# EAGLE board Qwiic Distance Sensor - VL53L1X-Panel (EAGLE 9.1.0), part 1 of 5
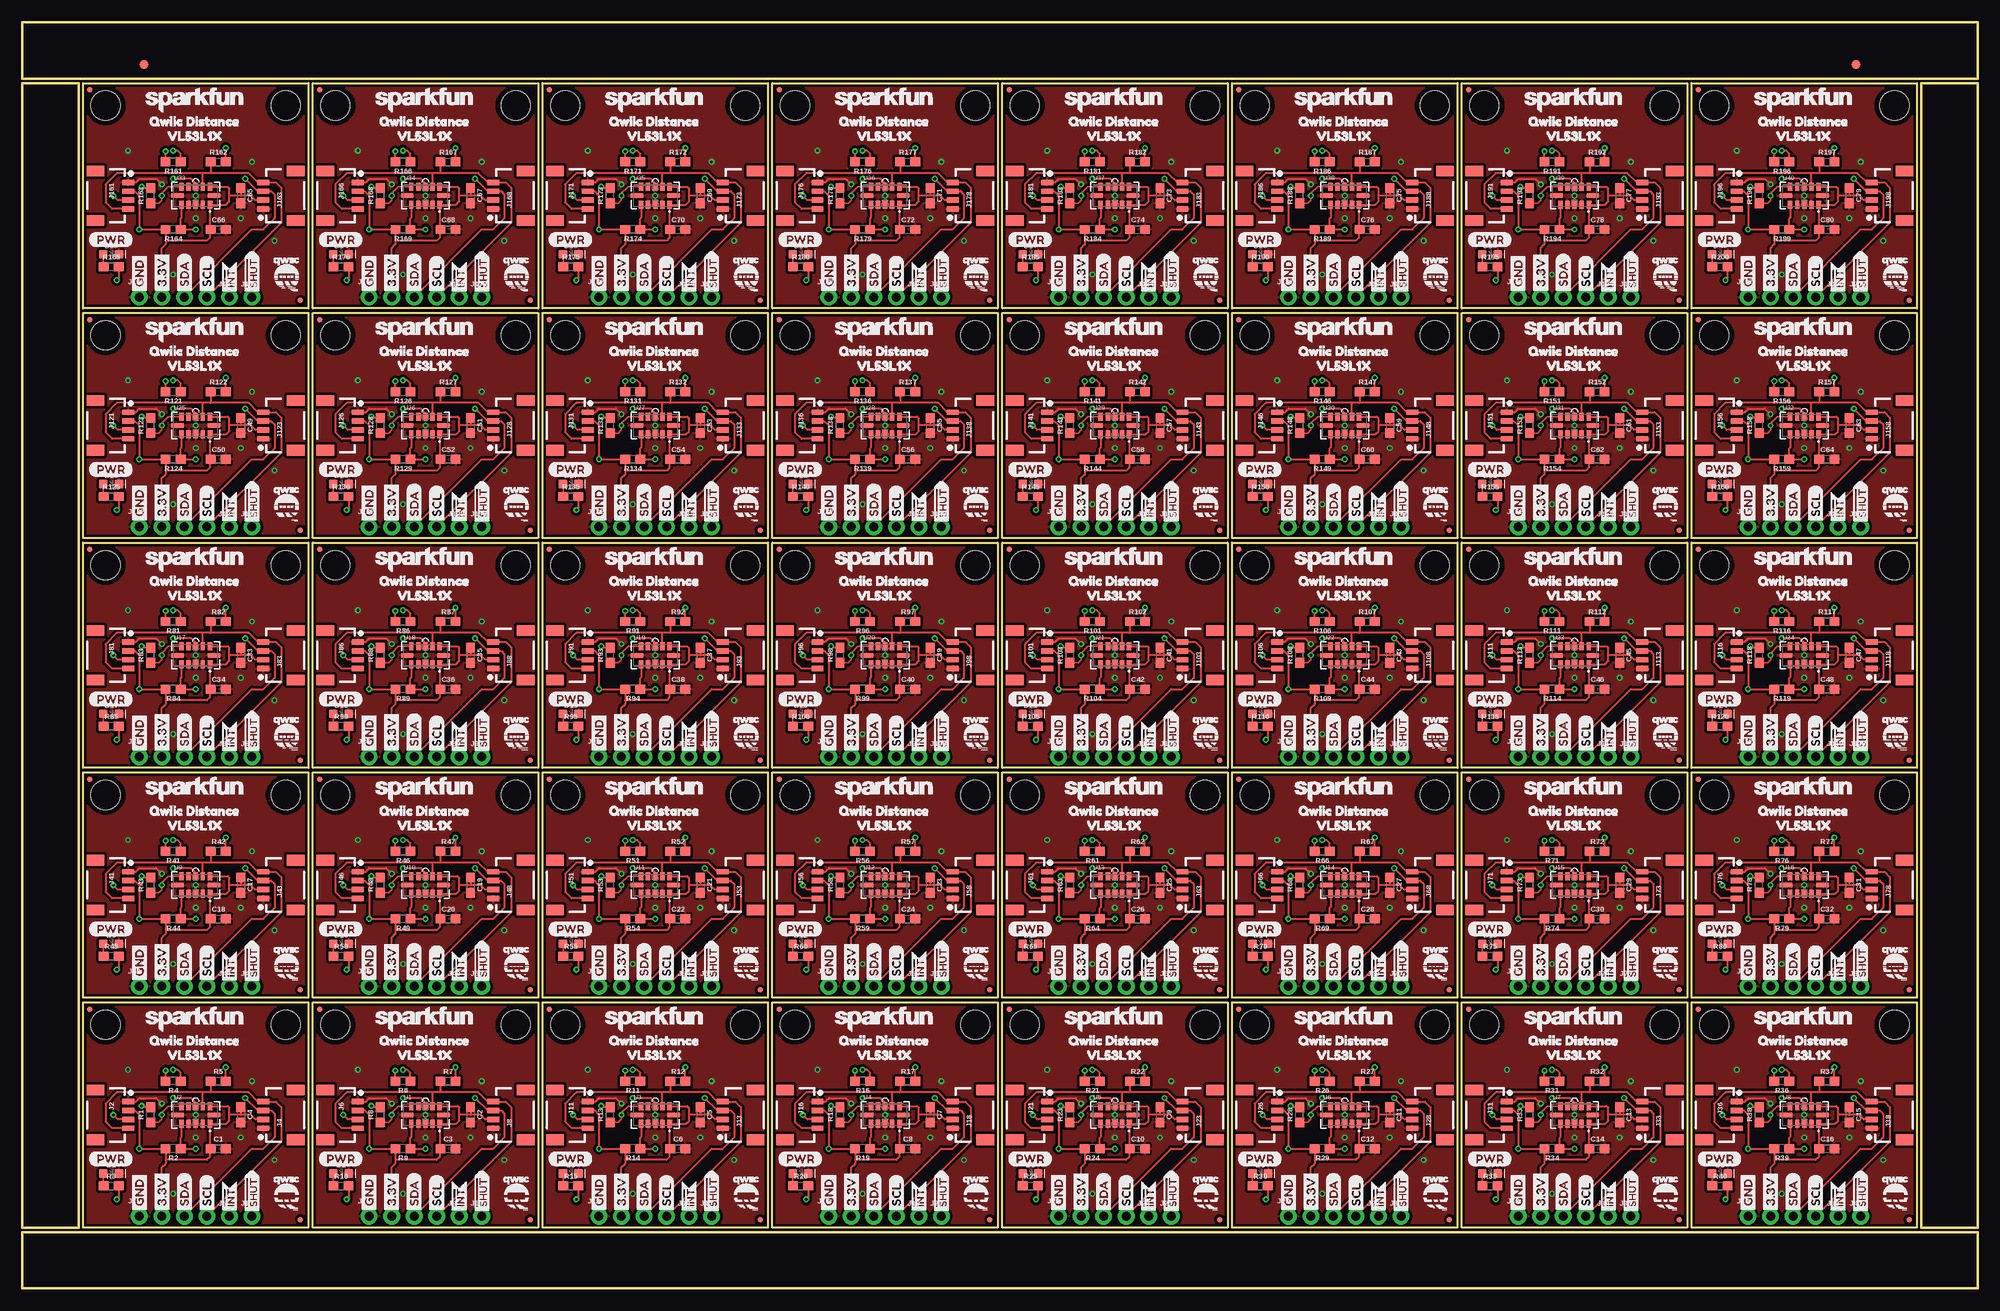
[diagram p0: board, top side]
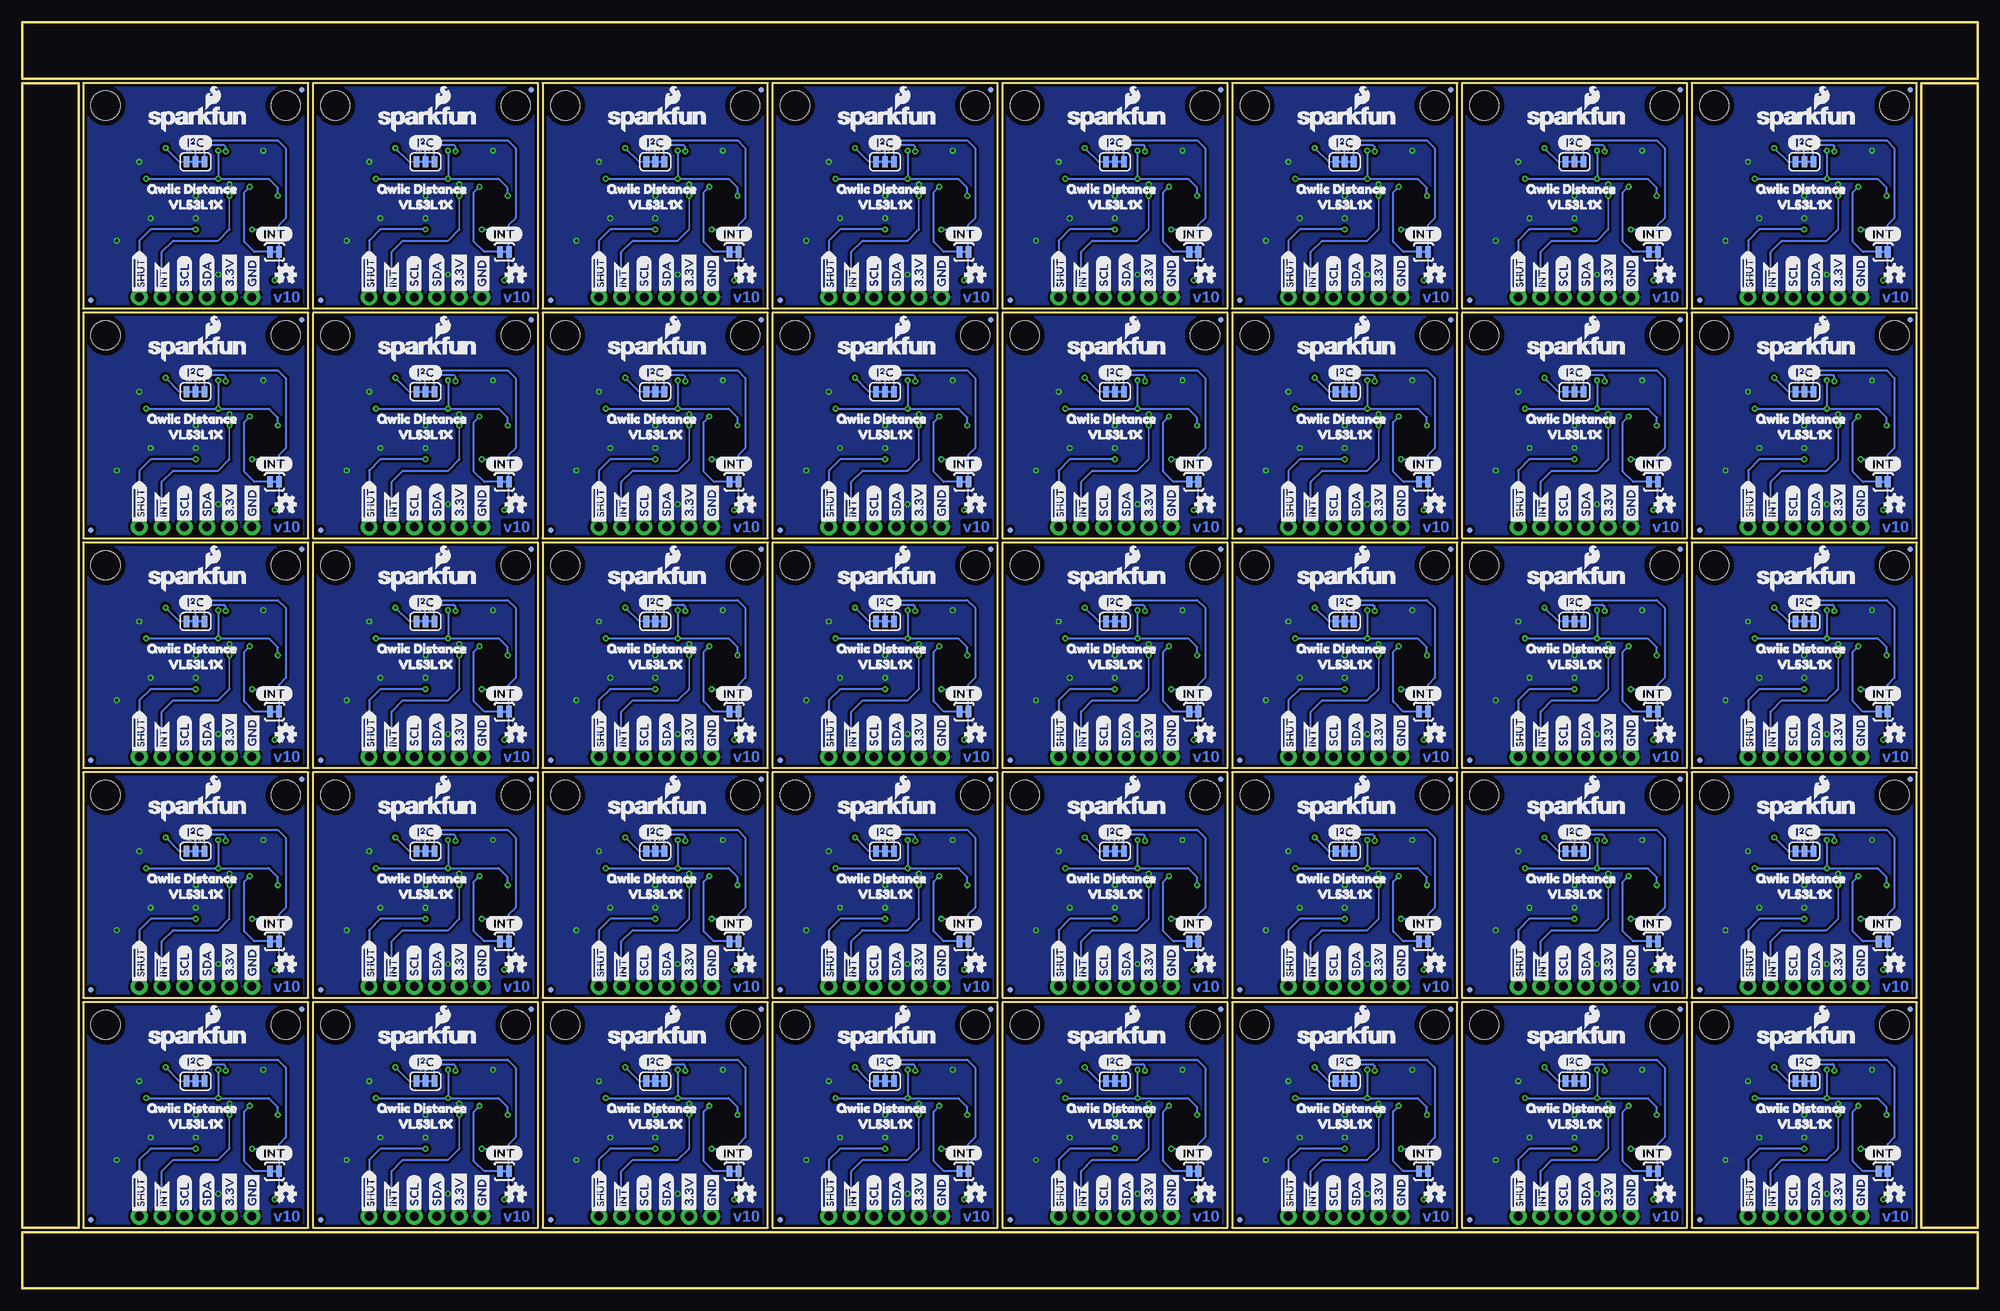
[diagram p1: board, bottom side, seen from below]

Size 220.47 x 142.75 mm. Coordinates in mm from the lower left corner, seen from the top.
Outline: 6.86,6.86 6.86,32.26 32.26,32.26 32.26,6.86 6.86,6.86
Outline: 32.77,6.86 32.77,32.26 58.17,32.26 58.17,6.86 32.77,6.86
Outline: 58.67,6.86 58.67,32.26 84.07,32.26 84.07,6.86 58.67,6.86
Outline: 84.58,6.86 84.58,32.26 109.98,32.26 109.98,6.86 84.58,6.86
Outline: 110.49,6.86 110.49,32.26 135.89,32.26 135.89,6.86 110.49,6.86
Outline: 136.4,6.86 136.4,32.26 161.8,32.26 161.8,6.86 136.4,6.86
Outline: 162.31,6.86 162.31,32.26 187.71,32.26 187.71,6.86 162.31,6.86
Outline: 188.21,6.86 188.21,32.26 213.61,32.26 213.61,6.86 188.21,6.86
Outline: 6.86,32.77 6.86,58.17 32.26,58.17 32.26,32.77 6.86,32.77
Outline: 32.77,32.77 32.77,58.17 58.17,58.17 58.17,32.77 32.77,32.77
Outline: 58.67,32.77 58.67,58.17 84.07,58.17 84.07,32.77 58.67,32.77
Outline: 84.58,32.77 84.58,58.17 109.98,58.17 109.98,32.77 84.58,32.77
Outline: 110.49,32.77 110.49,58.17 135.89,58.17 135.89,32.77 110.49,32.77
Outline: 136.4,32.77 136.4,58.17 161.8,58.17 161.8,32.77 136.4,32.77
Outline: 162.31,32.77 162.31,58.17 187.71,58.17 187.71,32.77 162.31,32.77
Outline: 188.21,32.77 188.21,58.17 213.61,58.17 213.61,32.77 188.21,32.77
Outline: 6.86,58.67 6.86,84.07 32.26,84.07 32.26,58.67 6.86,58.67
Outline: 32.77,58.67 32.77,84.07 58.17,84.07 58.17,58.67 32.77,58.67
Outline: 58.67,58.67 58.67,84.07 84.07,84.07 84.07,58.67 58.67,58.67
Outline: 84.58,58.67 84.58,84.07 109.98,84.07 109.98,58.67 84.58,58.67
Outline: 110.49,58.67 110.49,84.07 135.89,84.07 135.89,58.67 110.49,58.67
Outline: 136.4,58.67 136.4,84.07 161.8,84.07 161.8,58.67 136.4,58.67
Outline: 162.31,58.67 162.31,84.07 187.71,84.07 187.71,58.67 162.31,58.67
Outline: 188.21,58.67 188.21,84.07 213.61,84.07 213.61,58.67 188.21,58.67
Outline: 6.86,84.58 6.86,109.98 32.26,109.98 32.26,84.58 6.86,84.58
Outline: 32.77,84.58 32.77,109.98 58.17,109.98 58.17,84.58 32.77,84.58
Outline: 58.67,84.58 58.67,109.98 84.07,109.98 84.07,84.58 58.67,84.58
Outline: 84.58,84.58 84.58,109.98 109.98,109.98 109.98,84.58 84.58,84.58
Outline: 110.49,84.58 110.49,109.98 135.89,109.98 135.89,84.58 110.49,84.58
Outline: 136.4,84.58 136.4,109.98 161.8,109.98 161.8,84.58 136.4,84.58
Outline: 162.31,84.58 162.31,109.98 187.71,109.98 187.71,84.58 162.31,84.58
Outline: 188.21,84.58 188.21,109.98 213.61,109.98 213.61,84.58 188.21,84.58
Outline: 6.86,110.49 6.86,135.89 32.26,135.89 32.26,110.49 6.86,110.49
Outline: 32.77,110.49 32.77,135.89 58.17,135.89 58.17,110.49 32.77,110.49
Outline: 58.67,110.49 58.67,135.89 84.07,135.89 84.07,110.49 58.67,110.49
Outline: 84.58,110.49 84.58,135.89 109.98,135.89 109.98,110.49 84.58,110.49
Outline: 110.49,110.49 110.49,135.89 135.89,135.89 135.89,110.49 110.49,110.49
Outline: 136.4,110.49 136.4,135.89 161.8,135.89 161.8,110.49 136.4,110.49
Outline: 162.31,110.49 162.31,135.89 187.71,135.89 187.71,110.49 162.31,110.49
Outline: 188.21,110.49 188.21,135.89 213.61,135.89 213.61,110.49 188.21,110.49
Outline: 0,6.35 220.47,6.35 220.47,0 0,0 0,6.35
Outline: 214.12,135.89 220.47,135.89 220.47,6.86 214.12,6.86 214.12,135.89
Outline: 0,142.75 220.47,142.75 220.47,136.4 0,136.4 0,142.75
Outline: 0,135.89 6.35,135.89 6.35,6.86 0,6.86 0,135.89
Copper layers (1*16): Top 0.035mm / dielectric 1.5mm / Bottom 0.035mm
Design rules "SparkFun-2-layer-PCBWay-LIMIT": minimum track width 6mil, minimum drill 0.3mm, track to track 6mil, track to pad 6mil, pad to pad 6mil, via to via 6mil, smd to smd 6mil, copper to edge 6mil, drill to drill 6mil, minimum pad ring 7mil, minimum via ring 7mil, stop-mask expansion 4mil, vias tented up to drill 25mil, thermal gap 10mil

## Footprints (pad centres in the part's own frame; a part is rotated, then mirrored left to right if it is on the bottom)
0603 = smd 1.1 x 1: 1 -0.85,0; 2 0.85,0
LED-0603 = smd 1 x 1: A -0.877,0; C 0.877,0
FIDUCIAL-1X2 = smd 1 x 1: 1 0,0
SMT-JUMPER_3_2-NC_TRACE_SILK = smd 0.635 x 1.27: 1 -1.016,0; 2 0,0; 3 1.016,0
1X01_NO_SILK = drill 1.016 pad 1.88: 1 0,0
1X04_1MM_RA = smd 0.6 x 1.35: 1 -1.5,0; 2 -0.5,0; 3 0.5,0; 4 1.5,0 | smd 1.2 x 2: NC1 2.8,-3.675; NC2 -2.8,-3.675
1X04_NO_SILK = drill 1.016 pad 1.88: 1 0,0; 2 2.54,0; 3 5.08,0; 4 7.62,0
MICRO-FIDUCIAL = smd 0.635 x 0.635: 1 0,0
STAND-OFF = hole 3.302: 0,0
PAD-JUMPER-2-NC_BY_TRACE_YES_SILK = smd 0.635 x 1.27: 1 -0.508,0; 2 0.508,0
VL53L1X = smd 0.5 x 0.9: 1 1.6,-1; 2 0.8,-1; 3 0,-1; 4 -0.8,-1; 5 -1.6,-1; 7 -1.6,1; 8 -0.8,1; 9 0,1; 10 0.8,1; 11 1.6,1 | smd 1.4 x 0.5: 6 -2.05,0; 12 2.05,0

## Placement (x,y rotation side)
C1  4.7uF  [0603]  22.1,15.75 0 top
C2  0.1uF  [0603]  50.55,19.56 270 top
C3  4.7uF  [0603]  48.01,15.75 0 top
C4  0.1uF  [0603]  24.64,19.56 270 top
C5  0.1uF  [0603]  76.45,19.56 270 top
C6  4.7uF  [0603]  73.91,15.75 0 top
C7  0.1uF  [0603]  102.36,19.56 270 top
C8  4.7uF  [0603]  99.82,15.75 0 top
C9  0.1uF  [0603]  128.27,19.56 270 top
C10  4.7uF  [0603]  125.73,15.75 0 top
C11  0.1uF  [0603]  154.18,19.56 270 top
C12  4.7uF  [0603]  151.64,15.75 0 top
C13  0.1uF  [0603]  180.09,19.56 270 top
C14  4.7uF  [0603]  177.55,15.75 0 top
C15  0.1uF  [0603]  205.99,19.56 270 top
C16  4.7uF  [0603]  203.45,15.75 0 top
C17  0.1uF  [0603]  24.64,45.47 270 top
C18  4.7uF  [0603]  22.1,41.66 0 top
C19  0.1uF  [0603]  50.55,45.47 270 top
C20  4.7uF  [0603]  48.01,41.66 0 top
C21  0.1uF  [0603]  76.45,45.47 270 top
C22  4.7uF  [0603]  73.91,41.66 0 top
C23  0.1uF  [0603]  102.36,45.47 270 top
C24  4.7uF  [0603]  99.82,41.66 0 top
C25  0.1uF  [0603]  128.27,45.47 270 top
C26  4.7uF  [0603]  125.73,41.66 0 top
C27  0.1uF  [0603]  154.18,45.47 270 top
C28  4.7uF  [0603]  151.64,41.66 0 top
C29  0.1uF  [0603]  180.09,45.47 270 top
C30  4.7uF  [0603]  177.55,41.66 0 top
C31  0.1uF  [0603]  205.99,45.47 270 top
C32  4.7uF  [0603]  203.45,41.66 0 top
C33  0.1uF  [0603]  24.64,71.37 270 top
C34  4.7uF  [0603]  22.1,67.56 0 top
C35  0.1uF  [0603]  50.55,71.37 270 top
C36  4.7uF  [0603]  48.01,67.56 0 top
C37  0.1uF  [0603]  76.45,71.37 270 top
C38  4.7uF  [0603]  73.91,67.56 0 top
C39  0.1uF  [0603]  102.36,71.37 270 top
C40  4.7uF  [0603]  99.82,67.56 0 top
C41  0.1uF  [0603]  128.27,71.37 270 top
C42  4.7uF  [0603]  125.73,67.56 0 top
C43  0.1uF  [0603]  154.18,71.37 270 top
C44  4.7uF  [0603]  151.64,67.56 0 top
C45  0.1uF  [0603]  180.09,71.37 270 top
C46  4.7uF  [0603]  177.55,67.56 0 top
C47  0.1uF  [0603]  205.99,71.37 270 top
C48  4.7uF  [0603]  203.45,67.56 0 top
C49  0.1uF  [0603]  24.64,97.28 270 top
C50  4.7uF  [0603]  22.1,93.47 0 top
C51  0.1uF  [0603]  50.55,97.28 270 top
C52  4.7uF  [0603]  48.01,93.47 0 top
C53  0.1uF  [0603]  76.45,97.28 270 top
C54  4.7uF  [0603]  73.91,93.47 0 top
C55  0.1uF  [0603]  102.36,97.28 270 top
C56  4.7uF  [0603]  99.82,93.47 0 top
C57  0.1uF  [0603]  128.27,97.28 270 top
C58  4.7uF  [0603]  125.73,93.47 0 top
C59  0.1uF  [0603]  154.18,97.28 270 top
C60  4.7uF  [0603]  151.64,93.47 0 top
C61  0.1uF  [0603]  180.09,97.28 270 top
C62  4.7uF  [0603]  177.55,93.47 0 top
C63  0.1uF  [0603]  205.99,97.28 270 top
C64  4.7uF  [0603]  203.45,93.47 0 top
C65  0.1uF  [0603]  24.64,123.19 270 top
C66  4.7uF  [0603]  22.1,119.38 0 top
C67  0.1uF  [0603]  50.55,123.19 270 top
C68  4.7uF  [0603]  48.01,119.38 0 top
C69  0.1uF  [0603]  76.45,123.19 270 top
C70  4.7uF  [0603]  73.91,119.38 0 top
C71  0.1uF  [0603]  102.36,123.19 270 top
C72  4.7uF  [0603]  99.82,119.38 0 top
C73  0.1uF  [0603]  128.27,123.19 270 top
C74  4.7uF  [0603]  125.73,119.38 0 top
C75  0.1uF  [0603]  154.18,123.19 270 top
C76  4.7uF  [0603]  151.64,119.38 0 top
C77  0.1uF  [0603]  180.09,123.19 270 top
C78  4.7uF  [0603]  177.55,119.38 0 top
C79  0.1uF  [0603]  205.99,123.19 270 top
C80  4.7uF  [0603]  203.45,119.38 0 top
D1  RED  [LED-0603]  10.03,12.95 0 top
D2  RED  [LED-0603]  35.94,12.95 0 top
D3  RED  [LED-0603]  61.85,12.95 0 top
D4  RED  [LED-0603]  87.76,12.95 0 top
D5  RED  [LED-0603]  113.67,12.95 0 top
D6  RED  [LED-0603]  139.57,12.95 0 top
D7  RED  [LED-0603]  165.48,12.95 0 top
D8  RED  [LED-0603]  191.39,12.95 0 top
D9  RED  [LED-0603]  10.03,38.86 0 top
D10  RED  [LED-0603]  35.94,38.86 0 top
D11  RED  [LED-0603]  61.85,38.86 0 top
D12  RED  [LED-0603]  87.76,38.86 0 top
D13  RED  [LED-0603]  113.67,38.86 0 top
D14  RED  [LED-0603]  139.57,38.86 0 top
D15  RED  [LED-0603]  165.48,38.86 0 top
D16  RED  [LED-0603]  191.39,38.86 0 top
D17  RED  [LED-0603]  10.03,64.77 0 top
D18  RED  [LED-0603]  35.94,64.77 0 top
D19  RED  [LED-0603]  61.85,64.77 0 top
D20  RED  [LED-0603]  87.76,64.77 0 top
D21  RED  [LED-0603]  113.67,64.77 0 top
D22  RED  [LED-0603]  139.57,64.77 0 top
D23  RED  [LED-0603]  165.48,64.77 0 top
D24  RED  [LED-0603]  191.39,64.77 0 top
D25  RED  [LED-0603]  10.03,90.68 0 top
D26  RED  [LED-0603]  35.94,90.68 0 top
D27  RED  [LED-0603]  61.85,90.68 0 top
D28  RED  [LED-0603]  87.76,90.68 0 top
D29  RED  [LED-0603]  113.67,90.68 0 top
D30  RED  [LED-0603]  139.57,90.68 0 top
D31  RED  [LED-0603]  165.48,90.68 0 top
D32  RED  [LED-0603]  191.39,90.68 0 top
D33  RED  [LED-0603]  10.03,116.59 0 top
D34  RED  [LED-0603]  35.94,116.59 0 top
D35  RED  [LED-0603]  61.85,116.59 0 top
D36  RED  [LED-0603]  87.76,116.59 0 top
D37  RED  [LED-0603]  113.67,116.59 0 top
D38  RED  [LED-0603]  139.57,116.59 0 top
D39  RED  [LED-0603]  165.48,116.59 0 top
D40  RED  [LED-0603]  191.39,116.59 0 top
E$1  [FIDUCIAL-1X2]  13.72,137.99 0 top
E$2  [FIDUCIAL-1X2]  206.76,137.99 0 top
I2C  [SMT-JUMPER_3_2-NC_TRACE_SILK]  19.56,23.37 0 bottom
I2C1  [SMT-JUMPER_3_2-NC_TRACE_SILK]  45.47,23.37 0 bottom
I2C2  [SMT-JUMPER_3_2-NC_TRACE_SILK]  71.37,23.37 0 bottom
I2C3  [SMT-JUMPER_3_2-NC_TRACE_SILK]  97.28,23.37 0 bottom
I2C4  [SMT-JUMPER_3_2-NC_TRACE_SILK]  123.19,23.37 0 bottom
I2C5  [SMT-JUMPER_3_2-NC_TRACE_SILK]  149.1,23.37 0 bottom
I2C6  [SMT-JUMPER_3_2-NC_TRACE_SILK]  175.01,23.37 0 bottom
I2C7  [SMT-JUMPER_3_2-NC_TRACE_SILK]  200.91,23.37 0 bottom
I2C8  [SMT-JUMPER_3_2-NC_TRACE_SILK]  19.56,49.28 0 bottom
I2C9  [SMT-JUMPER_3_2-NC_TRACE_SILK]  45.47,49.28 0 bottom
I2C10  [SMT-JUMPER_3_2-NC_TRACE_SILK]  71.37,49.28 0 bottom
I2C11  [SMT-JUMPER_3_2-NC_TRACE_SILK]  97.28,49.28 0 bottom
I2C12  [SMT-JUMPER_3_2-NC_TRACE_SILK]  123.19,49.28 0 bottom
I2C13  [SMT-JUMPER_3_2-NC_TRACE_SILK]  149.1,49.28 0 bottom
I2C14  [SMT-JUMPER_3_2-NC_TRACE_SILK]  175.01,49.28 0 bottom
I2C15  [SMT-JUMPER_3_2-NC_TRACE_SILK]  200.91,49.28 0 bottom
I2C16  [SMT-JUMPER_3_2-NC_TRACE_SILK]  19.56,75.18 0 bottom
I2C17  [SMT-JUMPER_3_2-NC_TRACE_SILK]  45.47,75.18 0 bottom
I2C18  [SMT-JUMPER_3_2-NC_TRACE_SILK]  71.37,75.18 0 bottom
I2C19  [SMT-JUMPER_3_2-NC_TRACE_SILK]  97.28,75.18 0 bottom
I2C20  [SMT-JUMPER_3_2-NC_TRACE_SILK]  123.19,75.18 0 bottom
I2C21  [SMT-JUMPER_3_2-NC_TRACE_SILK]  149.1,75.18 0 bottom
I2C22  [SMT-JUMPER_3_2-NC_TRACE_SILK]  175.01,75.18 0 bottom
I2C23  [SMT-JUMPER_3_2-NC_TRACE_SILK]  200.91,75.18 0 bottom
I2C24  [SMT-JUMPER_3_2-NC_TRACE_SILK]  19.56,101.09 0 bottom
I2C25  [SMT-JUMPER_3_2-NC_TRACE_SILK]  45.47,101.09 0 bottom
I2C26  [SMT-JUMPER_3_2-NC_TRACE_SILK]  71.37,101.09 0 bottom
I2C27  [SMT-JUMPER_3_2-NC_TRACE_SILK]  97.28,101.09 0 bottom
I2C28  [SMT-JUMPER_3_2-NC_TRACE_SILK]  123.19,101.09 0 bottom
I2C29  [SMT-JUMPER_3_2-NC_TRACE_SILK]  149.1,101.09 0 bottom
I2C30  [SMT-JUMPER_3_2-NC_TRACE_SILK]  175.01,101.09 0 bottom
I2C31  [SMT-JUMPER_3_2-NC_TRACE_SILK]  200.91,101.09 0 bottom
I2C32  [SMT-JUMPER_3_2-NC_TRACE_SILK]  19.56,127 0 bottom
I2C33  [SMT-JUMPER_3_2-NC_TRACE_SILK]  45.47,127 0 bottom
I2C34  [SMT-JUMPER_3_2-NC_TRACE_SILK]  71.37,127 0 bottom
I2C35  [SMT-JUMPER_3_2-NC_TRACE_SILK]  97.28,127 0 bottom
I2C36  [SMT-JUMPER_3_2-NC_TRACE_SILK]  123.19,127 0 bottom
I2C37  [SMT-JUMPER_3_2-NC_TRACE_SILK]  149.1,127 0 bottom
I2C38  [SMT-JUMPER_3_2-NC_TRACE_SILK]  175.01,127 0 bottom
I2C39  [SMT-JUMPER_3_2-NC_TRACE_SILK]  200.91,127 0 bottom
J1  [1X01_NO_SILK]  25.91,8.13 0 top
J2  [1X04_1MM_RA]  11.94,19.56 270 top
J3  PTH  [1X04_NO_SILK]  13.21,8.13 0 top
J4  [1X04_1MM_RA]  27.18,19.56 90 top
J5  [1X01_NO_SILK]  23.37,8.13 0 top
J6  [1X04_1MM_RA]  37.85,19.56 270 top
J7  PTH  [1X04_NO_SILK]  39.12,8.13 0 top
J8  [1X04_1MM_RA]  53.09,19.56 90 top
J9  [1X01_NO_SILK]  49.28,8.13 0 top
J10  [1X01_NO_SILK]  51.82,8.13 0 top
J11  [1X04_1MM_RA]  63.75,19.56 270 top
J12  PTH  [1X04_NO_SILK]  65.02,8.13 0 top
J13  [1X04_1MM_RA]  78.99,19.56 90 top
J14  [1X01_NO_SILK]  75.18,8.13 0 top
J15  [1X01_NO_SILK]  77.72,8.13 0 top
J16  [1X04_1MM_RA]  89.66,19.56 270 top
J17  PTH  [1X04_NO_SILK]  90.93,8.13 0 top
J18  [1X04_1MM_RA]  104.9,19.56 90 top
J19  [1X01_NO_SILK]  101.09,8.13 0 top
J20  [1X01_NO_SILK]  103.63,8.13 0 top
J21  [1X04_1MM_RA]  115.57,19.56 270 top
J22  PTH  [1X04_NO_SILK]  116.84,8.13 0 top
J23  [1X04_1MM_RA]  130.81,19.56 90 top
J24  [1X01_NO_SILK]  127,8.13 0 top
J25  [1X01_NO_SILK]  129.54,8.13 0 top
J26  [1X04_1MM_RA]  141.48,19.56 270 top
J27  PTH  [1X04_NO_SILK]  142.75,8.13 0 top
J28  [1X04_1MM_RA]  156.72,19.56 90 top
J29  [1X01_NO_SILK]  152.91,8.13 0 top
J30  [1X01_NO_SILK]  155.45,8.13 0 top
J31  [1X04_1MM_RA]  167.39,19.56 270 top
J32  PTH  [1X04_NO_SILK]  168.66,8.13 0 top
J33  [1X04_1MM_RA]  182.63,19.56 90 top
J34  [1X01_NO_SILK]  178.82,8.13 0 top
J35  [1X01_NO_SILK]  181.36,8.13 0 top
J36  [1X04_1MM_RA]  193.29,19.56 270 top
J37  PTH  [1X04_NO_SILK]  194.56,8.13 0 top
J38  [1X04_1MM_RA]  208.53,19.56 90 top
J39  [1X01_NO_SILK]  204.72,8.13 0 top
J40  [1X01_NO_SILK]  207.26,8.13 0 top
J41  [1X04_1MM_RA]  11.94,45.47 270 top
J42  PTH  [1X04_NO_SILK]  13.21,34.04 0 top
J43  [1X04_1MM_RA]  27.18,45.47 90 top
J44  [1X01_NO_SILK]  23.37,34.04 0 top
J45  [1X01_NO_SILK]  25.91,34.04 0 top
J46  [1X04_1MM_RA]  37.85,45.47 270 top
J47  PTH  [1X04_NO_SILK]  39.12,34.04 0 top
J48  [1X04_1MM_RA]  53.09,45.47 90 top
J49  [1X01_NO_SILK]  49.28,34.04 0 top
J50  [1X01_NO_SILK]  51.82,34.04 0 top
J51  [1X04_1MM_RA]  63.75,45.47 270 top
J52  PTH  [1X04_NO_SILK]  65.02,34.04 0 top
J53  [1X04_1MM_RA]  78.99,45.47 90 top
J54  [1X01_NO_SILK]  75.18,34.04 0 top
J55  [1X01_NO_SILK]  77.72,34.04 0 top
J56  [1X04_1MM_RA]  89.66,45.47 270 top
J57  PTH  [1X04_NO_SILK]  90.93,34.04 0 top
J58  [1X04_1MM_RA]  104.9,45.47 90 top
J59  [1X01_NO_SILK]  101.09,34.04 0 top
J60  [1X01_NO_SILK]  103.63,34.04 0 top
J61  [1X04_1MM_RA]  115.57,45.47 270 top
J62  PTH  [1X04_NO_SILK]  116.84,34.04 0 top
J63  [1X04_1MM_RA]  130.81,45.47 90 top
J64  [1X01_NO_SILK]  127,34.04 0 top
J65  [1X01_NO_SILK]  129.54,34.04 0 top
J66  [1X04_1MM_RA]  141.48,45.47 270 top
J67  PTH  [1X04_NO_SILK]  142.75,34.04 0 top
J68  [1X04_1MM_RA]  156.72,45.47 90 top
J69  [1X01_NO_SILK]  152.91,34.04 0 top
J70  [1X01_NO_SILK]  155.45,34.04 0 top
J71  [1X04_1MM_RA]  167.39,45.47 270 top
J72  PTH  [1X04_NO_SILK]  168.66,34.04 0 top
J73  [1X04_1MM_RA]  182.63,45.47 90 top
J74  [1X01_NO_SILK]  178.82,34.04 0 top
J75  [1X01_NO_SILK]  181.36,34.04 0 top
J76  [1X04_1MM_RA]  193.29,45.47 270 top
J77  PTH  [1X04_NO_SILK]  194.56,34.04 0 top
J78  [1X04_1MM_RA]  208.53,45.47 90 top
J79  [1X01_NO_SILK]  204.72,34.04 0 top
J80  [1X01_NO_SILK]  207.26,34.04 0 top
J81  [1X04_1MM_RA]  11.94,71.37 270 top
J82  PTH  [1X04_NO_SILK]  13.21,59.94 0 top
J83  [1X04_1MM_RA]  27.18,71.37 90 top
J84  [1X01_NO_SILK]  23.37,59.94 0 top
J85  [1X01_NO_SILK]  25.91,59.94 0 top
J86  [1X04_1MM_RA]  37.85,71.37 270 top
J87  PTH  [1X04_NO_SILK]  39.12,59.94 0 top
J88  [1X04_1MM_RA]  53.09,71.37 90 top
J89  [1X01_NO_SILK]  49.28,59.94 0 top
J90  [1X01_NO_SILK]  51.82,59.94 0 top
J91  [1X04_1MM_RA]  63.75,71.37 270 top
J92  PTH  [1X04_NO_SILK]  65.02,59.94 0 top
J93  [1X04_1MM_RA]  78.99,71.37 90 top
J94  [1X01_NO_SILK]  75.18,59.94 0 top
J95  [1X01_NO_SILK]  77.72,59.94 0 top
J96  [1X04_1MM_RA]  89.66,71.37 270 top
J97  PTH  [1X04_NO_SILK]  90.93,59.94 0 top
J98  [1X04_1MM_RA]  104.9,71.37 90 top
J99  [1X01_NO_SILK]  101.09,59.94 0 top
J100  [1X01_NO_SILK]  103.63,59.94 0 top
J101  [1X04_1MM_RA]  115.57,71.37 270 top
J102  PTH  [1X04_NO_SILK]  116.84,59.94 0 top
J103  [1X04_1MM_RA]  130.81,71.37 90 top
J104  [1X01_NO_SILK]  127,59.94 0 top
J105  [1X01_NO_SILK]  129.54,59.94 0 top
J106  [1X04_1MM_RA]  141.48,71.37 270 top
J107  PTH  [1X04_NO_SILK]  142.75,59.94 0 top
J108  [1X04_1MM_RA]  156.72,71.37 90 top
J109  [1X01_NO_SILK]  152.91,59.94 0 top
J110  [1X01_NO_SILK]  155.45,59.94 0 top
J111  [1X04_1MM_RA]  167.39,71.37 270 top
J112  PTH  [1X04_NO_SILK]  168.66,59.94 0 top
J113  [1X04_1MM_RA]  182.63,71.37 90 top
J114  [1X01_NO_SILK]  178.82,59.94 0 top
J115  [1X01_NO_SILK]  181.36,59.94 0 top
J116  [1X04_1MM_RA]  193.29,71.37 270 top
J117  PTH  [1X04_NO_SILK]  194.56,59.94 0 top
J118  [1X04_1MM_RA]  208.53,71.37 90 top
J119  [1X01_NO_SILK]  204.72,59.94 0 top
J120  [1X01_NO_SILK]  207.26,59.94 0 top
J121  [1X04_1MM_RA]  11.94,97.28 270 top
J122  PTH  [1X04_NO_SILK]  13.21,85.85 0 top
J123  [1X04_1MM_RA]  27.18,97.28 90 top
J124  [1X01_NO_SILK]  23.37,85.85 0 top
J125  [1X01_NO_SILK]  25.91,85.85 0 top
J126  [1X04_1MM_RA]  37.85,97.28 270 top
J127  PTH  [1X04_NO_SILK]  39.12,85.85 0 top
J128  [1X04_1MM_RA]  53.09,97.28 90 top
J129  [1X01_NO_SILK]  49.28,85.85 0 top
J130  [1X01_NO_SILK]  51.82,85.85 0 top
J131  [1X04_1MM_RA]  63.75,97.28 270 top
J132  PTH  [1X04_NO_SILK]  65.02,85.85 0 top
J133  [1X04_1MM_RA]  78.99,97.28 90 top
J134  [1X01_NO_SILK]  75.18,85.85 0 top
J135  [1X01_NO_SILK]  77.72,85.85 0 top
J136  [1X04_1MM_RA]  89.66,97.28 270 top
J137  PTH  [1X04_NO_SILK]  90.93,85.85 0 top
J138  [1X04_1MM_RA]  104.9,97.28 90 top
J139  [1X01_NO_SILK]  101.09,85.85 0 top
J140  [1X01_NO_SILK]  103.63,85.85 0 top
J141  [1X04_1MM_RA]  115.57,97.28 270 top
J142  PTH  [1X04_NO_SILK]  116.84,85.85 0 top
J143  [1X04_1MM_RA]  130.81,97.28 90 top
J144  [1X01_NO_SILK]  127,85.85 0 top
J145  [1X01_NO_SILK]  129.54,85.85 0 top
J146  [1X04_1MM_RA]  141.48,97.28 270 top
J147  PTH  [1X04_NO_SILK]  142.75,85.85 0 top
J148  [1X04_1MM_RA]  156.72,97.28 90 top
J149  [1X01_NO_SILK]  152.91,85.85 0 top
J150  [1X01_NO_SILK]  155.45,85.85 0 top
J151  [1X04_1MM_RA]  167.39,97.28 270 top
J152  PTH  [1X04_NO_SILK]  168.66,85.85 0 top
J153  [1X04_1MM_RA]  182.63,97.28 90 top
J154  [1X01_NO_SILK]  178.82,85.85 0 top
J155  [1X01_NO_SILK]  181.36,85.85 0 top
J156  [1X04_1MM_RA]  193.29,97.28 270 top
J157  PTH  [1X04_NO_SILK]  194.56,85.85 0 top
J158  [1X04_1MM_RA]  208.53,97.28 90 top
J159  [1X01_NO_SILK]  204.72,85.85 0 top
J160  [1X01_NO_SILK]  207.26,85.85 0 top
J161  [1X04_1MM_RA]  11.94,123.19 270 top
J162  PTH  [1X04_NO_SILK]  13.21,111.76 0 top
J163  [1X04_1MM_RA]  27.18,123.19 90 top
J164  [1X01_NO_SILK]  23.37,111.76 0 top
J165  [1X01_NO_SILK]  25.91,111.76 0 top
J166  [1X04_1MM_RA]  37.85,123.19 270 top
J167  PTH  [1X04_NO_SILK]  39.12,111.76 0 top
J168  [1X04_1MM_RA]  53.09,123.19 90 top
J169  [1X01_NO_SILK]  49.28,111.76 0 top
J170  [1X01_NO_SILK]  51.82,111.76 0 top
J171  [1X04_1MM_RA]  63.75,123.19 270 top
J172  PTH  [1X04_NO_SILK]  65.02,111.76 0 top
J173  [1X04_1MM_RA]  78.99,123.19 90 top
J174  [1X01_NO_SILK]  75.18,111.76 0 top
J175  [1X01_NO_SILK]  77.72,111.76 0 top
J176  [1X04_1MM_RA]  89.66,123.19 270 top
J177  PTH  [1X04_NO_SILK]  90.93,111.76 0 top
J178  [1X04_1MM_RA]  104.9,123.19 90 top
J179  [1X01_NO_SILK]  101.09,111.76 0 top
J180  [1X01_NO_SILK]  103.63,111.76 0 top
J181  [1X04_1MM_RA]  115.57,123.19 270 top
J182  PTH  [1X04_NO_SILK]  116.84,111.76 0 top
J183  [1X04_1MM_RA]  130.81,123.19 90 top
J184  [1X01_NO_SILK]  127,111.76 0 top
J185  [1X01_NO_SILK]  129.54,111.76 0 top
J186  [1X04_1MM_RA]  141.48,123.19 270 top
J187  PTH  [1X04_NO_SILK]  142.75,111.76 0 top
J188  [1X04_1MM_RA]  156.72,123.19 90 top
J189  [1X01_NO_SILK]  152.91,111.76 0 top
J190  [1X01_NO_SILK]  155.45,111.76 0 top
J191  [1X04_1MM_RA]  167.39,123.19 270 top
J192  PTH  [1X04_NO_SILK]  168.66,111.76 0 top
J193  [1X04_1MM_RA]  182.63,123.19 90 top
J194  [1X01_NO_SILK]  178.82,111.76 0 top
J195  [1X01_NO_SILK]  181.36,111.76 0 top
J196  [1X04_1MM_RA]  193.29,123.19 270 top
J197  PTH  [1X04_NO_SILK]  194.56,111.76 0 top
J198  [1X04_1MM_RA]  208.53,123.19 90 top
J199  [1X01_NO_SILK]  204.72,111.76 0 top
J200  [1X01_NO_SILK]  207.26,111.76 0 top
JP1  FIDUCIALUFIDUCIAL  [MICRO-FIDUCIAL]  7.62,31.5 0 bottom
JP2  FIDUCIALUFIDUCIAL  [MICRO-FIDUCIAL]  31.37,7.75 0 top
JP3  STAND-OFF  [STAND-OFF]  9.4,29.72 0 top
JP4  STAND-OFF  [STAND-OFF]  29.72,29.72 0 top
JP5  FIDUCIALUFIDUCIAL  [MICRO-FIDUCIAL]  31.37,7.75 0 bottom
JP6  FIDUCIALUFIDUCIAL  [MICRO-FIDUCIAL]  7.62,31.5 0 top
JP7  STAND-OFF  [STAND-OFF]  35.31,29.72 0 top
JP8  STAND-OFF  [STAND-OFF]  55.63,29.72 0 top
JP9  INT  [PAD-JUMPER-2-NC_BY_TRACE_YES_SILK]  10.67,13.21 0 bottom
JP10  FIDUCIALUFIDUCIAL  [MICRO-FIDUCIAL]  57.28,7.75 0 top
JP11  FIDUCIALUFIDUCIAL  [MICRO-FIDUCIAL]  33.53,31.5 0 top
JP12  FIDUCIALUFIDUCIAL  [MICRO-FIDUCIAL]  33.53,31.5 0 bottom
JP13  FIDUCIALUFIDUCIAL  [MICRO-FIDUCIAL]  57.28,7.75 0 bottom
JP14  INT  [PAD-JUMPER-2-NC_BY_TRACE_YES_SILK]  36.58,13.21 0 bottom
JP15  STAND-OFF  [STAND-OFF]  61.21,29.72 0 top
JP16  STAND-OFF  [STAND-OFF]  81.53,29.72 0 top
JP17  FIDUCIALUFIDUCIAL  [MICRO-FIDUCIAL]  83.19,7.75 0 top
JP18  FIDUCIALUFIDUCIAL  [MICRO-FIDUCIAL]  59.44,31.5 0 top
JP19  FIDUCIALUFIDUCIAL  [MICRO-FIDUCIAL]  59.44,31.5 0 bottom
JP20  FIDUCIALUFIDUCIAL  [MICRO-FIDUCIAL]  83.19,7.75 0 bottom
JP21  INT  [PAD-JUMPER-2-NC_BY_TRACE_YES_SILK]  62.48,13.21 0 bottom
JP22  STAND-OFF  [STAND-OFF]  87.12,29.72 0 top
JP23  STAND-OFF  [STAND-OFF]  107.44,29.72 0 top
JP24  FIDUCIALUFIDUCIAL  [MICRO-FIDUCIAL]  109.09,7.75 0 top
JP25  FIDUCIALUFIDUCIAL  [MICRO-FIDUCIAL]  85.34,31.5 0 top
JP26  FIDUCIALUFIDUCIAL  [MICRO-FIDUCIAL]  85.34,31.5 0 bottom
JP27  FIDUCIALUFIDUCIAL  [MICRO-FIDUCIAL]  109.09,7.75 0 bottom
JP28  INT  [PAD-JUMPER-2-NC_BY_TRACE_YES_SILK]  88.39,13.21 0 bottom
JP29  STAND-OFF  [STAND-OFF]  113.03,29.72 0 top
JP30  STAND-OFF  [STAND-OFF]  133.35,29.72 0 top
JP31  FIDUCIALUFIDUCIAL  [MICRO-FIDUCIAL]  135,7.75 0 top
JP32  FIDUCIALUFIDUCIAL  [MICRO-FIDUCIAL]  111.25,31.5 0 top
JP33  FIDUCIALUFIDUCIAL  [MICRO-FIDUCIAL]  111.25,31.5 0 bottom
JP34  FIDUCIALUFIDUCIAL  [MICRO-FIDUCIAL]  135,7.75 0 bottom
JP35  INT  [PAD-JUMPER-2-NC_BY_TRACE_YES_SILK]  114.3,13.21 0 bottom
JP36  STAND-OFF  [STAND-OFF]  138.94,29.72 0 top
JP37  STAND-OFF  [STAND-OFF]  159.26,29.72 0 top
JP38  FIDUCIALUFIDUCIAL  [MICRO-FIDUCIAL]  160.91,7.75 0 top
JP39  FIDUCIALUFIDUCIAL  [MICRO-FIDUCIAL]  137.16,31.5 0 top
JP40  FIDUCIALUFIDUCIAL  [MICRO-FIDUCIAL]  137.16,31.5 0 bottom
JP41  FIDUCIALUFIDUCIAL  [MICRO-FIDUCIAL]  160.91,7.75 0 bottom
JP42  INT  [PAD-JUMPER-2-NC_BY_TRACE_YES_SILK]  140.21,13.21 0 bottom
JP43  STAND-OFF  [STAND-OFF]  164.85,29.72 0 top
JP44  STAND-OFF  [STAND-OFF]  185.17,29.72 0 top
JP45  FIDUCIALUFIDUCIAL  [MICRO-FIDUCIAL]  186.82,7.75 0 top
JP46  FIDUCIALUFIDUCIAL  [MICRO-FIDUCIAL]  163.07,31.5 0 top
JP47  FIDUCIALUFIDUCIAL  [MICRO-FIDUCIAL]  163.07,31.5 0 bottom
JP48  FIDUCIALUFIDUCIAL  [MICRO-FIDUCIAL]  186.82,7.75 0 bottom
JP49  INT  [PAD-JUMPER-2-NC_BY_TRACE_YES_SILK]  166.12,13.21 0 bottom
JP50  STAND-OFF  [STAND-OFF]  190.75,29.72 0 top
JP51  STAND-OFF  [STAND-OFF]  211.07,29.72 0 top
JP52  FIDUCIALUFIDUCIAL  [MICRO-FIDUCIAL]  212.72,7.75 0 top
JP53  FIDUCIALUFIDUCIAL  [MICRO-FIDUCIAL]  188.98,31.5 0 top
JP54  FIDUCIALUFIDUCIAL  [MICRO-FIDUCIAL]  188.98,31.5 0 bottom
JP55  FIDUCIALUFIDUCIAL  [MICRO-FIDUCIAL]  212.72,7.75 0 bottom
JP56  INT  [PAD-JUMPER-2-NC_BY_TRACE_YES_SILK]  192.02,13.21 0 bottom
JP57  STAND-OFF  [STAND-OFF]  9.4,55.63 0 top
JP58  STAND-OFF  [STAND-OFF]  29.72,55.63 0 top
JP59  FIDUCIALUFIDUCIAL  [MICRO-FIDUCIAL]  31.37,33.66 0 top
JP60  FIDUCIALUFIDUCIAL  [MICRO-FIDUCIAL]  7.62,57.4 0 top
JP61  FIDUCIALUFIDUCIAL  [MICRO-FIDUCIAL]  7.62,57.4 0 bottom
JP62  FIDUCIALUFIDUCIAL  [MICRO-FIDUCIAL]  31.37,33.66 0 bottom
JP63  INT  [PAD-JUMPER-2-NC_BY_TRACE_YES_SILK]  10.67,39.12 0 bottom
JP64  STAND-OFF  [STAND-OFF]  35.31,55.63 0 top
JP65  STAND-OFF  [STAND-OFF]  55.63,55.63 0 top
JP66  FIDUCIALUFIDUCIAL  [MICRO-FIDUCIAL]  57.28,33.66 0 top
JP67  FIDUCIALUFIDUCIAL  [MICRO-FIDUCIAL]  33.53,57.4 0 top
JP68  FIDUCIALUFIDUCIAL  [MICRO-FIDUCIAL]  33.53,57.4 0 bottom
JP69  FIDUCIALUFIDUCIAL  [MICRO-FIDUCIAL]  57.28,33.66 0 bottom
JP70  INT  [PAD-JUMPER-2-NC_BY_TRACE_YES_SILK]  36.58,39.12 0 bottom
JP71  STAND-OFF  [STAND-OFF]  61.21,55.63 0 top
JP72  STAND-OFF  [STAND-OFF]  81.53,55.63 0 top
JP73  FIDUCIALUFIDUCIAL  [MICRO-FIDUCIAL]  83.19,33.66 0 top
JP74  FIDUCIALUFIDUCIAL  [MICRO-FIDUCIAL]  59.44,57.4 0 top
JP75  FIDUCIALUFIDUCIAL  [MICRO-FIDUCIAL]  59.44,57.4 0 bottom
JP76  FIDUCIALUFIDUCIAL  [MICRO-FIDUCIAL]  83.19,33.66 0 bottom
JP77  INT  [PAD-JUMPER-2-NC_BY_TRACE_YES_SILK]  62.48,39.12 0 bottom
JP78  STAND-OFF  [STAND-OFF]  87.12,55.63 0 top
JP79  STAND-OFF  [STAND-OFF]  107.44,55.63 0 top
JP80  FIDUCIALUFIDUCIAL  [MICRO-FIDUCIAL]  109.09,33.66 0 top
JP81  FIDUCIALUFIDUCIAL  [MICRO-FIDUCIAL]  85.34,57.4 0 top
JP82  FIDUCIALUFIDUCIAL  [MICRO-FIDUCIAL]  85.34,57.4 0 bottom
JP83  FIDUCIALUFIDUCIAL  [MICRO-FIDUCIAL]  109.09,33.66 0 bottom
JP84  INT  [PAD-JUMPER-2-NC_BY_TRACE_YES_SILK]  88.39,39.12 0 bottom
JP85  STAND-OFF  [STAND-OFF]  113.03,55.63 0 top
JP86  STAND-OFF  [STAND-OFF]  133.35,55.63 0 top
JP87  FIDUCIALUFIDUCIAL  [MICRO-FIDUCIAL]  135,33.66 0 top
JP88  FIDUCIALUFIDUCIAL  [MICRO-FIDUCIAL]  111.25,57.4 0 top
JP89  FIDUCIALUFIDUCIAL  [MICRO-FIDUCIAL]  111.25,57.4 0 bottom
JP90  FIDUCIALUFIDUCIAL  [MICRO-FIDUCIAL]  135,33.66 0 bottom
JP91  INT  [PAD-JUMPER-2-NC_BY_TRACE_YES_SILK]  114.3,39.12 0 bottom
JP92  STAND-OFF  [STAND-OFF]  138.94,55.63 0 top
JP93  STAND-OFF  [STAND-OFF]  159.26,55.63 0 top
JP94  FIDUCIALUFIDUCIAL  [MICRO-FIDUCIAL]  160.91,33.66 0 top
JP95  FIDUCIALUFIDUCIAL  [MICRO-FIDUCIAL]  137.16,57.4 0 top
JP96  FIDUCIALUFIDUCIAL  [MICRO-FIDUCIAL]  137.16,57.4 0 bottom
JP97  FIDUCIALUFIDUCIAL  [MICRO-FIDUCIAL]  160.91,33.66 0 bottom
JP98  INT  [PAD-JUMPER-2-NC_BY_TRACE_YES_SILK]  140.21,39.12 0 bottom
JP99  STAND-OFF  [STAND-OFF]  164.85,55.63 0 top
JP100  STAND-OFF  [STAND-OFF]  185.17,55.63 0 top
JP101  FIDUCIALUFIDUCIAL  [MICRO-FIDUCIAL]  186.82,33.66 0 top
JP102  FIDUCIALUFIDUCIAL  [MICRO-FIDUCIAL]  163.07,57.4 0 top
JP103  FIDUCIALUFIDUCIAL  [MICRO-FIDUCIAL]  163.07,57.4 0 bottom
JP104  FIDUCIALUFIDUCIAL  [MICRO-FIDUCIAL]  186.82,33.66 0 bottom
JP105  INT  [PAD-JUMPER-2-NC_BY_TRACE_YES_SILK]  166.12,39.12 0 bottom
JP106  STAND-OFF  [STAND-OFF]  190.75,55.63 0 top
JP107  STAND-OFF  [STAND-OFF]  211.07,55.63 0 top
JP108  FIDUCIALUFIDUCIAL  [MICRO-FIDUCIAL]  212.72,33.66 0 top
JP109  FIDUCIALUFIDUCIAL  [MICRO-FIDUCIAL]  188.98,57.4 0 top
JP110  FIDUCIALUFIDUCIAL  [MICRO-FIDUCIAL]  188.98,57.4 0 bottom
JP111  FIDUCIALUFIDUCIAL  [MICRO-FIDUCIAL]  212.72,33.66 0 bottom
JP112  INT  [PAD-JUMPER-2-NC_BY_TRACE_YES_SILK]  192.02,39.12 0 bottom
JP113  STAND-OFF  [STAND-OFF]  9.4,81.53 0 top
JP114  STAND-OFF  [STAND-OFF]  29.72,81.53 0 top
JP115  FIDUCIALUFIDUCIAL  [MICRO-FIDUCIAL]  31.37,59.56 0 top
JP116  FIDUCIALUFIDUCIAL  [MICRO-FIDUCIAL]  7.62,83.31 0 top
JP117  FIDUCIALUFIDUCIAL  [MICRO-FIDUCIAL]  7.62,83.31 0 bottom
JP118  FIDUCIALUFIDUCIAL  [MICRO-FIDUCIAL]  31.37,59.56 0 bottom
JP119  INT  [PAD-JUMPER-2-NC_BY_TRACE_YES_SILK]  10.67,65.02 0 bottom
JP120  STAND-OFF  [STAND-OFF]  35.31,81.53 0 top
JP121  STAND-OFF  [STAND-OFF]  55.63,81.53 0 top
JP122  FIDUCIALUFIDUCIAL  [MICRO-FIDUCIAL]  57.28,59.56 0 top
JP123  FIDUCIALUFIDUCIAL  [MICRO-FIDUCIAL]  33.53,83.31 0 top
JP124  FIDUCIALUFIDUCIAL  [MICRO-FIDUCIAL]  33.53,83.31 0 bottom
JP125  FIDUCIALUFIDUCIAL  [MICRO-FIDUCIAL]  57.28,59.56 0 bottom
JP126  INT  [PAD-JUMPER-2-NC_BY_TRACE_YES_SILK]  36.58,65.02 0 bottom
JP127  STAND-OFF  [STAND-OFF]  61.21,81.53 0 top
JP128  STAND-OFF  [STAND-OFF]  81.53,81.53 0 top
JP129  FIDUCIALUFIDUCIAL  [MICRO-FIDUCIAL]  83.19,59.56 0 top
JP130  FIDUCIALUFIDUCIAL  [MICRO-FIDUCIAL]  59.44,83.31 0 top
JP131  FIDUCIALUFIDUCIAL  [MICRO-FIDUCIAL]  59.44,83.31 0 bottom
JP132  FIDUCIALUFIDUCIAL  [MICRO-FIDUCIAL]  83.19,59.56 0 bottom
JP133  INT  [PAD-JUMPER-2-NC_BY_TRACE_YES_SILK]  62.48,65.02 0 bottom
JP134  STAND-OFF  [STAND-OFF]  87.12,81.53 0 top
JP135  STAND-OFF  [STAND-OFF]  107.44,81.53 0 top
JP136  FIDUCIALUFIDUCIAL  [MICRO-FIDUCIAL]  109.09,59.56 0 top
JP137  FIDUCIALUFIDUCIAL  [MICRO-FIDUCIAL]  85.34,83.31 0 top
JP138  FIDUCIALUFIDUCIAL  [MICRO-FIDUCIAL]  85.34,83.31 0 bottom
JP139  FIDUCIALUFIDUCIAL  [MICRO-FIDUCIAL]  109.09,59.56 0 bottom
JP140  INT  [PAD-JUMPER-2-NC_BY_TRACE_YES_SILK]  88.39,65.02 0 bottom
JP141  STAND-OFF  [STAND-OFF]  113.03,81.53 0 top
JP142  STAND-OFF  [STAND-OFF]  133.35,81.53 0 top
JP143  FIDUCIALUFIDUCIAL  [MICRO-FIDUCIAL]  135,59.56 0 top
JP144  FIDUCIALUFIDUCIAL  [MICRO-FIDUCIAL]  111.25,83.31 0 top
JP145  FIDUCIALUFIDUCIAL  [MICRO-FIDUCIAL]  111.25,83.31 0 bottom
JP146  FIDUCIALUFIDUCIAL  [MICRO-FIDUCIAL]  135,59.56 0 bottom
JP147  INT  [PAD-JUMPER-2-NC_BY_TRACE_YES_SILK]  114.3,65.02 0 bottom
JP148  STAND-OFF  [STAND-OFF]  138.94,81.53 0 top
JP149  STAND-OFF  [STAND-OFF]  159.26,81.53 0 top
JP150  FIDUCIALUFIDUCIAL  [MICRO-FIDUCIAL]  160.91,59.56 0 top
JP151  FIDUCIALUFIDUCIAL  [MICRO-FIDUCIAL]  137.16,83.31 0 top
JP152  FIDUCIALUFIDUCIAL  [MICRO-FIDUCIAL]  137.16,83.31 0 bottom
JP153  FIDUCIALUFIDUCIAL  [MICRO-FIDUCIAL]  160.91,59.56 0 bottom
JP154  INT  [PAD-JUMPER-2-NC_BY_TRACE_YES_SILK]  140.21,65.02 0 bottom
JP155  STAND-OFF  [STAND-OFF]  164.85,81.53 0 top
JP156  STAND-OFF  [STAND-OFF]  185.17,81.53 0 top
JP157  FIDUCIALUFIDUCIAL  [MICRO-FIDUCIAL]  186.82,59.56 0 top
JP158  FIDUCIALUFIDUCIAL  [MICRO-FIDUCIAL]  163.07,83.31 0 top
JP159  FIDUCIALUFIDUCIAL  [MICRO-FIDUCIAL]  163.07,83.31 0 bottom
JP160  FIDUCIALUFIDUCIAL  [MICRO-FIDUCIAL]  186.82,59.56 0 bottom
JP161  INT  [PAD-JUMPER-2-NC_BY_TRACE_YES_SILK]  166.12,65.02 0 bottom
JP162  STAND-OFF  [STAND-OFF]  190.75,81.53 0 top
JP163  STAND-OFF  [STAND-OFF]  211.07,81.53 0 top
JP164  FIDUCIALUFIDUCIAL  [MICRO-FIDUCIAL]  212.72,59.56 0 top
JP165  FIDUCIALUFIDUCIAL  [MICRO-FIDUCIAL]  188.98,83.31 0 top
JP166  FIDUCIALUFIDUCIAL  [MICRO-FIDUCIAL]  188.98,83.31 0 bottom
JP167  FIDUCIALUFIDUCIAL  [MICRO-FIDUCIAL]  212.72,59.56 0 bottom
JP168  INT  [PAD-JUMPER-2-NC_BY_TRACE_YES_SILK]  192.02,65.02 0 bottom
JP169  STAND-OFF  [STAND-OFF]  9.4,107.44 0 top
JP170  STAND-OFF  [STAND-OFF]  29.72,107.44 0 top
JP171  FIDUCIALUFIDUCIAL  [MICRO-FIDUCIAL]  31.37,85.47 0 top
JP172  FIDUCIALUFIDUCIAL  [MICRO-FIDUCIAL]  7.62,109.22 0 top
JP173  FIDUCIALUFIDUCIAL  [MICRO-FIDUCIAL]  7.62,109.22 0 bottom
JP174  FIDUCIALUFIDUCIAL  [MICRO-FIDUCIAL]  31.37,85.47 0 bottom
JP175  INT  [PAD-JUMPER-2-NC_BY_TRACE_YES_SILK]  10.67,90.93 0 bottom
JP176  STAND-OFF  [STAND-OFF]  35.31,107.44 0 top
JP177  STAND-OFF  [STAND-OFF]  55.63,107.44 0 top
JP178  FIDUCIALUFIDUCIAL  [MICRO-FIDUCIAL]  57.28,85.47 0 top
JP179  FIDUCIALUFIDUCIAL  [MICRO-FIDUCIAL]  33.53,109.22 0 top
JP180  FIDUCIALUFIDUCIAL  [MICRO-FIDUCIAL]  33.53,109.22 0 bottom
JP181  FIDUCIALUFIDUCIAL  [MICRO-FIDUCIAL]  57.28,85.47 0 bottom
JP182  INT  [PAD-JUMPER-2-NC_BY_TRACE_YES_SILK]  36.58,90.93 0 bottom
JP183  STAND-OFF  [STAND-OFF]  61.21,107.44 0 top
JP184  STAND-OFF  [STAND-OFF]  81.53,107.44 0 top
JP185  FIDUCIALUFIDUCIAL  [MICRO-FIDUCIAL]  83.19,85.47 0 top
JP186  FIDUCIALUFIDUCIAL  [MICRO-FIDUCIAL]  59.44,109.22 0 top
JP187  FIDUCIALUFIDUCIAL  [MICRO-FIDUCIAL]  59.44,109.22 0 bottom
JP188  FIDUCIALUFIDUCIAL  [MICRO-FIDUCIAL]  83.19,85.47 0 bottom
JP189  INT  [PAD-JUMPER-2-NC_BY_TRACE_YES_SILK]  62.48,90.93 0 bottom
JP190  STAND-OFF  [STAND-OFF]  87.12,107.44 0 top
JP191  STAND-OFF  [STAND-OFF]  107.44,107.44 0 top
JP192  FIDUCIALUFIDUCIAL  [MICRO-FIDUCIAL]  109.09,85.47 0 top
JP193  FIDUCIALUFIDUCIAL  [MICRO-FIDUCIAL]  85.34,109.22 0 top
JP194  FIDUCIALUFIDUCIAL  [MICRO-FIDUCIAL]  85.34,109.22 0 bottom
JP195  FIDUCIALUFIDUCIAL  [MICRO-FIDUCIAL]  109.09,85.47 0 bottom
JP196  INT  [PAD-JUMPER-2-NC_BY_TRACE_YES_SILK]  88.39,90.93 0 bottom
JP197  STAND-OFF  [STAND-OFF]  113.03,107.44 0 top
JP198  STAND-OFF  [STAND-OFF]  133.35,107.44 0 top
JP199  FIDUCIALUFIDUCIAL  [MICRO-FIDUCIAL]  135,85.47 0 top
JP200  FIDUCIALUFIDUCIAL  [MICRO-FIDUCIAL]  111.25,109.22 0 top
JP201  FIDUCIALUFIDUCIAL  [MICRO-FIDUCIAL]  111.25,109.22 0 bottom
JP202  FIDUCIALUFIDUCIAL  [MICRO-FIDUCIAL]  135,85.47 0 bottom
JP203  INT  [PAD-JUMPER-2-NC_BY_TRACE_YES_SILK]  114.3,90.93 0 bottom
JP204  STAND-OFF  [STAND-OFF]  138.94,107.44 0 top
JP205  STAND-OFF  [STAND-OFF]  159.26,107.44 0 top
JP206  FIDUCIALUFIDUCIAL  [MICRO-FIDUCIAL]  160.91,85.47 0 top
JP207  FIDUCIALUFIDUCIAL  [MICRO-FIDUCIAL]  137.16,109.22 0 top
JP208  FIDUCIALUFIDUCIAL  [MICRO-FIDUCIAL]  137.16,109.22 0 bottom
JP209  FIDUCIALUFIDUCIAL  [MICRO-FIDUCIAL]  160.91,85.47 0 bottom
JP210  INT  [PAD-JUMPER-2-NC_BY_TRACE_YES_SILK]  140.21,90.93 0 bottom
JP211  STAND-OFF  [STAND-OFF]  164.85,107.44 0 top
JP212  STAND-OFF  [STAND-OFF]  185.17,107.44 0 top
JP213  FIDUCIALUFIDUCIAL  [MICRO-FIDUCIAL]  186.82,85.47 0 top
JP214  FIDUCIALUFIDUCIAL  [MICRO-FIDUCIAL]  163.07,109.22 0 top
JP215  FIDUCIALUFIDUCIAL  [MICRO-FIDUCIAL]  163.07,109.22 0 bottom
JP216  FIDUCIALUFIDUCIAL  [MICRO-FIDUCIAL]  186.82,85.47 0 bottom
JP217  INT  [PAD-JUMPER-2-NC_BY_TRACE_YES_SILK]  166.12,90.93 0 bottom
JP218  STAND-OFF  [STAND-OFF]  190.75,107.44 0 top
JP219  STAND-OFF  [STAND-OFF]  211.07,107.44 0 top
JP220  FIDUCIALUFIDUCIAL  [MICRO-FIDUCIAL]  212.72,85.47 0 top
JP221  FIDUCIALUFIDUCIAL  [MICRO-FIDUCIAL]  188.98,109.22 0 top
JP222  FIDUCIALUFIDUCIAL  [MICRO-FIDUCIAL]  188.98,109.22 0 bottom
JP223  FIDUCIALUFIDUCIAL  [MICRO-FIDUCIAL]  212.72,85.47 0 bottom
JP224  INT  [PAD-JUMPER-2-NC_BY_TRACE_YES_SILK]  192.02,90.93 0 bottom
JP225  STAND-OFF  [STAND-OFF]  9.4,133.35 0 top
JP226  STAND-OFF  [STAND-OFF]  29.72,133.35 0 top
JP227  FIDUCIALUFIDUCIAL  [MICRO-FIDUCIAL]  31.37,111.38 0 top
JP228  FIDUCIALUFIDUCIAL  [MICRO-FIDUCIAL]  7.62,135.13 0 top
JP229  FIDUCIALUFIDUCIAL  [MICRO-FIDUCIAL]  7.62,135.13 0 bottom
JP230  FIDUCIALUFIDUCIAL  [MICRO-FIDUCIAL]  31.37,111.38 0 bottom
JP231  INT  [PAD-JUMPER-2-NC_BY_TRACE_YES_SILK]  10.67,116.84 0 bottom
JP232  STAND-OFF  [STAND-OFF]  35.31,133.35 0 top
JP233  STAND-OFF  [STAND-OFF]  55.63,133.35 0 top
JP234  FIDUCIALUFIDUCIAL  [MICRO-FIDUCIAL]  57.28,111.38 0 top
JP235  FIDUCIALUFIDUCIAL  [MICRO-FIDUCIAL]  33.53,135.13 0 top
JP236  FIDUCIALUFIDUCIAL  [MICRO-FIDUCIAL]  33.53,135.13 0 bottom
JP237  FIDUCIALUFIDUCIAL  [MICRO-FIDUCIAL]  57.28,111.38 0 bottom
JP238  INT  [PAD-JUMPER-2-NC_BY_TRACE_YES_SILK]  36.58,116.84 0 bottom
JP239  STAND-OFF  [STAND-OFF]  61.21,133.35 0 top
JP240  STAND-OFF  [STAND-OFF]  81.53,133.35 0 top
JP241  FIDUCIALUFIDUCIAL  [MICRO-FIDUCIAL]  83.19,111.38 0 top
JP242  FIDUCIALUFIDUCIAL  [MICRO-FIDUCIAL]  59.44,135.13 0 top
JP243  FIDUCIALUFIDUCIAL  [MICRO-FIDUCIAL]  59.44,135.13 0 bottom
JP244  FIDUCIALUFIDUCIAL  [MICRO-FIDUCIAL]  83.19,111.38 0 bottom
JP245  INT  [PAD-JUMPER-2-NC_BY_TRACE_YES_SILK]  62.48,116.84 0 bottom
JP246  STAND-OFF  [STAND-OFF]  87.12,133.35 0 top
JP247  STAND-OFF  [STAND-OFF]  107.44,133.35 0 top
JP248  FIDUCIALUFIDUCIAL  [MICRO-FIDUCIAL]  109.09,111.38 0 top
JP249  FIDUCIALUFIDUCIAL  [MICRO-FIDUCIAL]  85.34,135.13 0 top
JP250  FIDUCIALUFIDUCIAL  [MICRO-FIDUCIAL]  85.34,135.13 0 bottom
JP251  FIDUCIALUFIDUCIAL  [MICRO-FIDUCIAL]  109.09,111.38 0 bottom
JP252  INT  [PAD-JUMPER-2-NC_BY_TRACE_YES_SILK]  88.39,116.84 0 bottom
JP253  STAND-OFF  [STAND-OFF]  113.03,133.35 0 top
JP254  STAND-OFF  [STAND-OFF]  133.35,133.35 0 top
JP255  FIDUCIALUFIDUCIAL  [MICRO-FIDUCIAL]  135,111.38 0 top
JP256  FIDUCIALUFIDUCIAL  [MICRO-FIDUCIAL]  111.25,135.13 0 top
JP257  FIDUCIALUFIDUCIAL  [MICRO-FIDUCIAL]  111.25,135.13 0 bottom
JP258  FIDUCIALUFIDUCIAL  [MICRO-FIDUCIAL]  135,111.38 0 bottom
JP259  INT  [PAD-JUMPER-2-NC_BY_TRACE_YES_SILK]  114.3,116.84 0 bottom
JP260  STAND-OFF  [STAND-OFF]  138.94,133.35 0 top
JP261  STAND-OFF  [STAND-OFF]  159.26,133.35 0 top
JP262  FIDUCIALUFIDUCIAL  [MICRO-FIDUCIAL]  160.91,111.38 0 top
JP263  FIDUCIALUFIDUCIAL  [MICRO-FIDUCIAL]  137.16,135.13 0 top
JP264  FIDUCIALUFIDUCIAL  [MICRO-FIDUCIAL]  137.16,135.13 0 bottom
JP265  FIDUCIALUFIDUCIAL  [MICRO-FIDUCIAL]  160.91,111.38 0 bottom
JP266  INT  [PAD-JUMPER-2-NC_BY_TRACE_YES_SILK]  140.21,116.84 0 bottom
JP267  STAND-OFF  [STAND-OFF]  164.85,133.35 0 top
JP268  STAND-OFF  [STAND-OFF]  185.17,133.35 0 top
JP269  FIDUCIALUFIDUCIAL  [MICRO-FIDUCIAL]  186.82,111.38 0 top
JP270  FIDUCIALUFIDUCIAL  [MICRO-FIDUCIAL]  163.07,135.13 0 top
JP271  FIDUCIALUFIDUCIAL  [MICRO-FIDUCIAL]  163.07,135.13 0 bottom
JP272  FIDUCIALUFIDUCIAL  [MICRO-FIDUCIAL]  186.82,111.38 0 bottom
JP273  INT  [PAD-JUMPER-2-NC_BY_TRACE_YES_SILK]  166.12,116.84 0 bottom
JP274  STAND-OFF  [STAND-OFF]  190.75,133.35 0 top
JP275  STAND-OFF  [STAND-OFF]  211.07,133.35 0 top
JP276  FIDUCIALUFIDUCIAL  [MICRO-FIDUCIAL]  212.72,111.38 0 top
JP277  FIDUCIALUFIDUCIAL  [MICRO-FIDUCIAL]  188.98,135.13 0 top
JP278  FIDUCIALUFIDUCIAL  [MICRO-FIDUCIAL]  188.98,135.13 0 bottom
JP279  FIDUCIALUFIDUCIAL  [MICRO-FIDUCIAL]  212.72,111.38 0 bottom
JP280  INT  [PAD-JUMPER-2-NC_BY_TRACE_YES_SILK]  192.02,116.84 0 bottom
LOGO1  OSHW-LOGOMINI  [OSHW-LOGO-MINI]  9.4,10.67 0 bottom
LOGO2  OSHW-LOGOMINI  [OSHW-LOGO-MINI]  35.31,10.67 0 bottom
LOGO3  OSHW-LOGOMINI  [OSHW-LOGO-MINI]  61.21,10.67 0 bottom
LOGO4  OSHW-LOGOMINI  [OSHW-LOGO-MINI]  87.12,10.67 0 bottom
LOGO5  OSHW-LOGOMINI  [OSHW-LOGO-MINI]  113.03,10.67 0 bottom
LOGO6  OSHW-LOGOMINI  [OSHW-LOGO-MINI]  138.94,10.67 0 bottom
LOGO7  OSHW-LOGOMINI  [OSHW-LOGO-MINI]  164.85,10.67 0 bottom
LOGO8  OSHW-LOGOMINI  [OSHW-LOGO-MINI]  190.75,10.67 0 bottom
LOGO9  OSHW-LOGOMINI  [OSHW-LOGO-MINI]  9.4,36.58 0 bottom
LOGO10  OSHW-LOGOMINI  [OSHW-LOGO-MINI]  35.31,36.58 0 bottom
LOGO11  OSHW-LOGOMINI  [OSHW-LOGO-MINI]  61.21,36.58 0 bottom
LOGO12  OSHW-LOGOMINI  [OSHW-LOGO-MINI]  87.12,36.58 0 bottom
LOGO13  OSHW-LOGOMINI  [OSHW-LOGO-MINI]  113.03,36.58 0 bottom
LOGO14  OSHW-LOGOMINI  [OSHW-LOGO-MINI]  138.94,36.58 0 bottom
LOGO15  OSHW-LOGOMINI  [OSHW-LOGO-MINI]  164.85,36.58 0 bottom
LOGO16  OSHW-LOGOMINI  [OSHW-LOGO-MINI]  190.75,36.58 0 bottom
LOGO17  OSHW-LOGOMINI  [OSHW-LOGO-MINI]  9.4,62.48 0 bottom
LOGO18  OSHW-LOGOMINI  [OSHW-LOGO-MINI]  35.31,62.48 0 bottom
LOGO19  OSHW-LOGOMINI  [OSHW-LOGO-MINI]  61.21,62.48 0 bottom
LOGO20  OSHW-LOGOMINI  [OSHW-LOGO-MINI]  87.12,62.48 0 bottom
LOGO21  OSHW-LOGOMINI  [OSHW-LOGO-MINI]  113.03,62.48 0 bottom
LOGO22  OSHW-LOGOMINI  [OSHW-LOGO-MINI]  138.94,62.48 0 bottom
LOGO23  OSHW-LOGOMINI  [OSHW-LOGO-MINI]  164.85,62.48 0 bottom
LOGO24  OSHW-LOGOMINI  [OSHW-LOGO-MINI]  190.75,62.48 0 bottom
LOGO25  OSHW-LOGOMINI  [OSHW-LOGO-MINI]  9.4,88.39 0 bottom
LOGO26  OSHW-LOGOMINI  [OSHW-LOGO-MINI]  35.31,88.39 0 bottom
LOGO27  OSHW-LOGOMINI  [OSHW-LOGO-MINI]  61.21,88.39 0 bottom
LOGO28  OSHW-LOGOMINI  [OSHW-LOGO-MINI]  87.12,88.39 0 bottom
LOGO29  OSHW-LOGOMINI  [OSHW-LOGO-MINI]  113.03,88.39 0 bottom
LOGO30  OSHW-LOGOMINI  [OSHW-LOGO-MINI]  138.94,88.39 0 bottom
LOGO31  OSHW-LOGOMINI  [OSHW-LOGO-MINI]  164.85,88.39 0 bottom
LOGO32  OSHW-LOGOMINI  [OSHW-LOGO-MINI]  190.75,88.39 0 bottom
LOGO33  OSHW-LOGOMINI  [OSHW-LOGO-MINI]  9.4,114.3 0 bottom
LOGO34  OSHW-LOGOMINI  [OSHW-LOGO-MINI]  35.31,114.3 0 bottom
LOGO35  OSHW-LOGOMINI  [OSHW-LOGO-MINI]  61.21,114.3 0 bottom
LOGO36  OSHW-LOGOMINI  [OSHW-LOGO-MINI]  87.12,114.3 0 bottom
LOGO37  OSHW-LOGOMINI  [OSHW-LOGO-MINI]  113.03,114.3 0 bottom
LOGO38  OSHW-LOGOMINI  [OSHW-LOGO-MINI]  138.94,114.3 0 bottom
LOGO39  OSHW-LOGOMINI  [OSHW-LOGO-MINI]  164.85,114.3 0 bottom
LOGO40  OSHW-LOGOMINI  [OSHW-LOGO-MINI]  190.75,114.3 0 bottom
R1  10k  [0603]  14.48,19.56 90 top
R2  10k  [0603]  17.02,15.75 180 top
R3  1k  [0603]  10.03,11.56 0 top
R4  2.2k  [0603]  17.02,23.37 180 top
R5  2.2k  [0603]  22.1,23.37 0 top
R6  2.2k  [0603]  42.93,23.37 180 top
R7  2.2k  [0603]  48.01,23.37 0 top
R8  10k  [0603]  40.39,19.56 90 top
R9  10k  [0603]  42.93,15.75 180 top
R10  1k  [0603]  35.94,11.56 0 top
R11  2.2k  [0603]  68.83,23.37 180 top
R12  2.2k  [0603]  73.91,23.37 0 top
R13  10k  [0603]  66.29,19.56 90 top
R14  10k  [0603]  68.83,15.75 180 top
R15  1k  [0603]  61.85,11.56 0 top
R16  2.2k  [0603]  94.74,23.37 180 top
R17  2.2k  [0603]  99.82,23.37 0 top
R18  10k  [0603]  92.2,19.56 90 top
R19  10k  [0603]  94.74,15.75 180 top
R20  1k  [0603]  87.76,11.56 0 top
R21  2.2k  [0603]  120.65,23.37 180 top
R22  2.2k  [0603]  125.73,23.37 0 top
R23  10k  [0603]  118.11,19.56 90 top
R24  10k  [0603]  120.65,15.75 180 top
R25  1k  [0603]  113.67,11.56 0 top
R26  2.2k  [0603]  146.56,23.37 180 top
R27  2.2k  [0603]  151.64,23.37 0 top
R28  10k  [0603]  144.02,19.56 90 top
R29  10k  [0603]  146.56,15.75 180 top
R30  1k  [0603]  139.57,11.56 0 top
R31  2.2k  [0603]  172.47,23.37 180 top
R32  2.2k  [0603]  177.55,23.37 0 top
R33  10k  [0603]  169.93,19.56 90 top
R34  10k  [0603]  172.47,15.75 180 top
R35  1k  [0603]  165.48,11.56 0 top
R36  2.2k  [0603]  198.37,23.37 180 top
R37  2.2k  [0603]  203.45,23.37 0 top
R38  10k  [0603]  195.83,19.56 90 top
R39  10k  [0603]  198.37,15.75 180 top
R40  1k  [0603]  191.39,11.56 0 top
R41  2.2k  [0603]  17.02,49.28 180 top
R42  2.2k  [0603]  22.1,49.28 0 top
R43  10k  [0603]  14.48,45.47 90 top
R44  10k  [0603]  17.02,41.66 180 top
R45  1k  [0603]  10.03,37.46 0 top
R46  2.2k  [0603]  42.93,49.28 180 top
R47  2.2k  [0603]  48.01,49.28 0 top
R48  10k  [0603]  40.39,45.47 90 top
R49  10k  [0603]  42.93,41.66 180 top
R50  1k  [0603]  35.94,37.46 0 top
R51  2.2k  [0603]  68.83,49.28 180 top
R52  2.2k  [0603]  73.91,49.28 0 top
R53  10k  [0603]  66.29,45.47 90 top
R54  10k  [0603]  68.83,41.66 180 top
R55  1k  [0603]  61.85,37.46 0 top
R56  2.2k  [0603]  94.74,49.28 180 top
R57  2.2k  [0603]  99.82,49.28 0 top
R58  10k  [0603]  92.2,45.47 90 top
R59  10k  [0603]  94.74,41.66 180 top
R60  1k  [0603]  87.76,37.46 0 top
R61  2.2k  [0603]  120.65,49.28 180 top
R62  2.2k  [0603]  125.73,49.28 0 top
R63  10k  [0603]  118.11,45.47 90 top
R64  10k  [0603]  120.65,41.66 180 top
R65  1k  [0603]  113.67,37.46 0 top
R66  2.2k  [0603]  146.56,49.28 180 top
R67  2.2k  [0603]  151.64,49.28 0 top
R68  10k  [0603]  144.02,45.47 90 top
R69  10k  [0603]  146.56,41.66 180 top
R70  1k  [0603]  139.57,37.46 0 top
R71  2.2k  [0603]  172.47,49.28 180 top
R72  2.2k  [0603]  177.55,49.28 0 top
R73  10k  [0603]  169.93,45.47 90 top
R74  10k  [0603]  172.47,41.66 180 top
R75  1k  [0603]  165.48,37.46 0 top
R76  2.2k  [0603]  198.37,49.28 180 top
R77  2.2k  [0603]  203.45,49.28 0 top
R78  10k  [0603]  195.83,45.47 90 top
R79  10k  [0603]  198.37,41.66 180 top
R80  1k  [0603]  191.39,37.46 0 top
R81  2.2k  [0603]  17.02,75.18 180 top
R82  2.2k  [0603]  22.1,75.18 0 top
R83  10k  [0603]  14.48,71.37 90 top
R84  10k  [0603]  17.02,67.56 180 top
R85  1k  [0603]  10.03,63.37 0 top
R86  2.2k  [0603]  42.93,75.18 180 top
R87  2.2k  [0603]  48.01,75.18 0 top
R88  10k  [0603]  40.39,71.37 90 top
R89  10k  [0603]  42.93,67.56 180 top
R90  1k  [0603]  35.94,63.37 0 top
R91  2.2k  [0603]  68.83,75.18 180 top
R92  2.2k  [0603]  73.91,75.18 0 top
R93  10k  [0603]  66.29,71.37 90 top
R94  10k  [0603]  68.83,67.56 180 top
R95  1k  [0603]  61.85,63.37 0 top
R96  2.2k  [0603]  94.74,75.18 180 top
R97  2.2k  [0603]  99.82,75.18 0 top
R98  10k  [0603]  92.2,71.37 90 top
R99  10k  [0603]  94.74,67.56 180 top
R100  1k  [0603]  87.76,63.37 0 top
R101  2.2k  [0603]  120.65,75.18 180 top
R102  2.2k  [0603]  125.73,75.18 0 top
R103  10k  [0603]  118.11,71.37 90 top
R104  10k  [0603]  120.65,67.56 180 top
R105  1k  [0603]  113.67,63.37 0 top
R106  2.2k  [0603]  146.56,75.18 180 top
R107  2.2k  [0603]  151.64,75.18 0 top
R108  10k  [0603]  144.02,71.37 90 top
R109  10k  [0603]  146.56,67.56 180 top
R110  1k  [0603]  139.57,63.37 0 top
R111  2.2k  [0603]  172.47,75.18 180 top
R112  2.2k  [0603]  177.55,75.18 0 top
R113  10k  [0603]  169.93,71.37 90 top
R114  10k  [0603]  172.47,67.56 180 top
R115  1k  [0603]  165.48,63.37 0 top
R116  2.2k  [0603]  198.37,75.18 180 top
R117  2.2k  [0603]  203.45,75.18 0 top
R118  10k  [0603]  195.83,71.37 90 top
R119  10k  [0603]  198.37,67.56 180 top
R120  1k  [0603]  191.39,63.37 0 top
R121  2.2k  [0603]  17.02,101.09 180 top
R122  2.2k  [0603]  22.1,101.09 0 top
R123  10k  [0603]  14.48,97.28 90 top
R124  10k  [0603]  17.02,93.47 180 top
R125  1k  [0603]  10.03,89.28 0 top
R126  2.2k  [0603]  42.93,101.09 180 top
R127  2.2k  [0603]  48.01,101.09 0 top
R128  10k  [0603]  40.39,97.28 90 top
R129  10k  [0603]  42.93,93.47 180 top
R130  1k  [0603]  35.94,89.28 0 top
R131  2.2k  [0603]  68.83,101.09 180 top
R132  2.2k  [0603]  73.91,101.09 0 top
R133  10k  [0603]  66.29,97.28 90 top
R134  10k  [0603]  68.83,93.47 180 top
R135  1k  [0603]  61.85,89.28 0 top
R136  2.2k  [0603]  94.74,101.09 180 top
R137  2.2k  [0603]  99.82,101.09 0 top
R138  10k  [0603]  92.2,97.28 90 top
R139  10k  [0603]  94.74,93.47 180 top
R140  1k  [0603]  87.76,89.28 0 top
R141  2.2k  [0603]  120.65,101.09 180 top
R142  2.2k  [0603]  125.73,101.09 0 top
R143  10k  [0603]  118.11,97.28 90 top
R144  10k  [0603]  120.65,93.47 180 top
R145  1k  [0603]  113.67,89.28 0 top
R146  2.2k  [0603]  146.56,101.09 180 top
R147  2.2k  [0603]  151.64,101.09 0 top
R148  10k  [0603]  144.02,97.28 90 top
R149  10k  [0603]  146.56,93.47 180 top
R150  1k  [0603]  139.57,89.28 0 top
R151  2.2k  [0603]  172.47,101.09 180 top
R152  2.2k  [0603]  177.55,101.09 0 top
R153  10k  [0603]  169.93,97.28 90 top
R154  10k  [0603]  172.47,93.47 180 top
R155  1k  [0603]  165.48,89.28 0 top
R156  2.2k  [0603]  198.37,101.09 180 top
R157  2.2k  [0603]  203.45,101.09 0 top
R158  10k  [0603]  195.83,97.28 90 top
R159  10k  [0603]  198.37,93.47 180 top
R160  1k  [0603]  191.39,89.28 0 top
R161  2.2k  [0603]  17.02,127 180 top
R162  2.2k  [0603]  22.1,127 0 top
R163  10k  [0603]  14.48,123.19 90 top
R164  10k  [0603]  17.02,119.38 180 top
R165  1k  [0603]  10.03,115.19 0 top
R166  2.2k  [0603]  42.93,127 180 top
R167  2.2k  [0603]  48.01,127 0 top
R168  10k  [0603]  40.39,123.19 90 top
R169  10k  [0603]  42.93,119.38 180 top
R170  1k  [0603]  35.94,115.19 0 top
R171  2.2k  [0603]  68.83,127 180 top
R172  2.2k  [0603]  73.91,127 0 top
R173  10k  [0603]  66.29,123.19 90 top
R174  10k  [0603]  68.83,119.38 180 top
R175  1k  [0603]  61.85,115.19 0 top
R176  2.2k  [0603]  94.74,127 180 top
R177  2.2k  [0603]  99.82,127 0 top
R178  10k  [0603]  92.2,123.19 90 top
R179  10k  [0603]  94.74,119.38 180 top
R180  1k  [0603]  87.76,115.19 0 top
R181  2.2k  [0603]  120.65,127 180 top
R182  2.2k  [0603]  125.73,127 0 top
R183  10k  [0603]  118.11,123.19 90 top
R184  10k  [0603]  120.65,119.38 180 top
R185  1k  [0603]  113.67,115.19 0 top
R186  2.2k  [0603]  146.56,127 180 top
R187  2.2k  [0603]  151.64,127 0 top
R188  10k  [0603]  144.02,123.19 90 top
R189  10k  [0603]  146.56,119.38 180 top
R190  1k  [0603]  139.57,115.19 0 top
R191  2.2k  [0603]  172.47,127 180 top
R192  2.2k  [0603]  177.55,127 0 top
R193  10k  [0603]  169.93,123.19 90 top
R194  10k  [0603]  172.47,119.38 180 top
R195  1k  [0603]  165.48,115.19 0 top
R196  2.2k  [0603]  198.37,127 180 top
R197  2.2k  [0603]  203.45,127 0 top
R198  10k  [0603]  195.83,123.19 90 top
R199  10k  [0603]  198.37,119.38 180 top
R200  1k  [0603]  191.39,115.19 0 top
U1  VL53L1X  [VL53L1X]  45.47,19.56 0 top
U2  VL53L1X  [VL53L1X]  19.56,19.56 0 top
U3  VL53L1X  [VL53L1X]  71.37,19.56 0 top
U4  VL53L1X  [VL53L1X]  97.28,19.56 0 top
U5  VL53L1X  [VL53L1X]  123.19,19.56 0 top
U6  VL53L1X  [VL53L1X]  149.1,19.56 0 top
U7  VL53L1X  [VL53L1X]  175.01,19.56 0 top
U8  VL53L1X  [VL53L1X]  200.91,19.56 0 top
U9  VL53L1X  [VL53L1X]  19.56,45.47 0 top
U10  VL53L1X  [VL53L1X]  45.47,45.47 0 top
U11  VL53L1X  [VL53L1X]  71.37,45.47 0 top
U12  VL53L1X  [VL53L1X]  97.28,45.47 0 top
U13  VL53L1X  [VL53L1X]  123.19,45.47 0 top
U14  VL53L1X  [VL53L1X]  149.1,45.47 0 top
U15  VL53L1X  [VL53L1X]  175.01,45.47 0 top
U16  VL53L1X  [VL53L1X]  200.91,45.47 0 top
U17  VL53L1X  [VL53L1X]  19.56,71.37 0 top
U18  VL53L1X  [VL53L1X]  45.47,71.37 0 top
U19  VL53L1X  [VL53L1X]  71.37,71.37 0 top
U20  VL53L1X  [VL53L1X]  97.28,71.37 0 top
U21  VL53L1X  [VL53L1X]  123.19,71.37 0 top
U22  VL53L1X  [VL53L1X]  149.1,71.37 0 top
U23  VL53L1X  [VL53L1X]  175.01,71.37 0 top
U24  VL53L1X  [VL53L1X]  200.91,71.37 0 top
U25  VL53L1X  [VL53L1X]  19.56,97.28 0 top
U26  VL53L1X  [VL53L1X]  45.47,97.28 0 top
U27  VL53L1X  [VL53L1X]  71.37,97.28 0 top
U28  VL53L1X  [VL53L1X]  97.28,97.28 0 top
U29  VL53L1X  [VL53L1X]  123.19,97.28 0 top
U30  VL53L1X  [VL53L1X]  149.1,97.28 0 top
U31  VL53L1X  [VL53L1X]  175.01,97.28 0 top
U32  VL53L1X  [VL53L1X]  200.91,97.28 0 top
U33  VL53L1X  [VL53L1X]  19.56,123.19 0 top
U34  VL53L1X  [VL53L1X]  45.47,123.19 0 top
U35  VL53L1X  [VL53L1X]  71.37,123.19 0 top
U36  VL53L1X  [VL53L1X]  97.28,123.19 0 top
U37  VL53L1X  [VL53L1X]  123.19,123.19 0 top
U38  VL53L1X  [VL53L1X]  149.1,123.19 0 top
U39  VL53L1X  [VL53L1X]  175.01,123.19 0 top
U40  VL53L1X  [VL53L1X]  200.91,123.19 0 top
U$1  SFE_LOGO_NAME.1_INCH  [SFE_LOGO_NAME_.1]  13.46,28.45 0 top
U$2  SFE_LOGO_NAME_FLAME.1_INCH  [SFE_LOGO_NAME_FLAME_.1]  25.27,26.67 0 bottom
U$3  [GND1]  13.21,8.38 90 bottom
U$4  [3#3V2]  15.75,8.38 90 bottom
U$5  [SDA8]  18.29,8.38 90 bottom
U$6  [SCL9]  20.83,8.38 90 bottom
U$7  [INT#-[<]  23.37,8.13 90 top
U$8  [#SHUT15]  25.91,8.13 90 top
U$9  [#SHUT15]  25.91,8.13 90 bottom
U$10  [(PWR)]  7.49,14.61 0 top
U$11  [(I_SUPER2_C)]  21.46,25.53 0 bottom
U$12  [(INT)]  12.83,15.24 0 bottom
U$13  [QWIIC-LOGO-SMALL]  29.72,10.67 0 top
U$14  [INT#-[<]  23.37,8.13 90 bottom
U$15  [QWIIC_DISTANCE0]  25.91,20.32 0 bottom
U$16  [VL53L1X1]  23.5,18.54 0 bottom
U$17  SFE_LOGO_NAME_FLAME.1_INCH  [SFE_LOGO_NAME_FLAME_.1]  51.18,26.67 0 bottom
U$18  SFE_LOGO_NAME.1_INCH  [SFE_LOGO_NAME_.1]  39.37,28.45 0 top
U$19  [QWIIC_DISTANCE0]  13.46,27.94 0 top
U$20  [VL53L1X1]  15.49,26.29 0 top
U$21  [3#3V2]  15.75,8.38 90 top
U$22  [GND1]  13.21,8.38 90 top
U$23  [QWIIC_DISTANCE0]  51.82,20.32 0 bottom
U$24  [VL53L1X1]  49.4,18.54 0 bottom
U$25  [QWIIC_DISTANCE0]  39.37,27.94 0 top
U$26  [SCL9]  20.83,8.38 90 top
U$27  [SDA8]  18.29,8.38 90 top
U$28  [VL53L1X1]  41.4,26.29 0 top
U$29  [3#3V2]  41.66,8.38 90 top
U$30  [GND1]  39.12,8.38 90 top
U$31  [SCL9]  46.74,8.38 90 top
U$32  [SDA8]  44.2,8.38 90 top
U$33  [GND1]  39.12,8.38 90 bottom
U$34  [3#3V2]  41.66,8.38 90 bottom
U$35  [SDA8]  44.2,8.38 90 bottom
U$36  [SCL9]  46.74,8.38 90 bottom
U$37  [#SHUT15]  51.82,8.13 90 top
U$38  [#SHUT15]  51.82,8.13 90 bottom
U$39  [(PWR)]  33.4,14.61 0 top
U$40  [(I_SUPER2_C)]  47.37,25.53 0 bottom
U$41  [(INT)]  38.73,15.24 0 bottom
U$42  [QWIIC-LOGO-SMALL]  55.63,10.67 0 top
U$43  [INT#-[<]  49.28,8.13 90 top
U$44  [INT#-[<]  49.28,8.13 90 bottom
U$45  SFE_LOGO_NAME_FLAME.1_INCH  [SFE_LOGO_NAME_FLAME_.1]  77.09,26.67 0 bottom
U$46  SFE_LOGO_NAME.1_INCH  [SFE_LOGO_NAME_.1]  65.28,28.45 0 top
U$47  [QWIIC_DISTANCE0]  77.72,20.32 0 bottom
U$48  [VL53L1X1]  75.31,18.54 0 bottom
U$49  [QWIIC_DISTANCE0]  65.28,27.94 0 top
U$50  [VL53L1X1]  67.31,26.29 0 top
U$51  [3#3V2]  67.56,8.38 90 top
U$52  [GND1]  65.02,8.38 90 top
U$53  [SCL9]  72.64,8.38 90 top
U$54  [SDA8]  70.1,8.38 90 top
U$55  [GND1]  65.02,8.38 90 bottom
U$56  [3#3V2]  67.56,8.38 90 bottom
U$57  [SDA8]  70.1,8.38 90 bottom
U$58  [SCL9]  72.64,8.38 90 bottom
U$59  [#SHUT15]  77.72,8.13 90 top
U$60  [#SHUT15]  77.72,8.13 90 bottom
U$61  [(PWR)]  59.31,14.61 0 top
U$62  [(I_SUPER2_C)]  73.28,25.53 0 bottom
U$63  [(INT)]  64.64,15.24 0 bottom
U$64  [QWIIC-LOGO-SMALL]  81.53,10.67 0 top
U$65  [INT#-[<]  75.18,8.13 90 top
U$66  [INT#-[<]  75.18,8.13 90 bottom
U$67  SFE_LOGO_NAME_FLAME.1_INCH  [SFE_LOGO_NAME_FLAME_.1]  103,26.67 0 bottom
U$68  SFE_LOGO_NAME.1_INCH  [SFE_LOGO_NAME_.1]  91.19,28.45 0 top
U$69  [QWIIC_DISTANCE0]  103.63,20.32 0 bottom
U$70  [VL53L1X1]  101.22,18.54 0 bottom
U$71  [QWIIC_DISTANCE0]  91.19,27.94 0 top
U$72  [VL53L1X1]  93.22,26.29 0 top
U$73  [3#3V2]  93.47,8.38 90 top
U$74  [GND1]  90.93,8.38 90 top
U$75  [SCL9]  98.55,8.38 90 top
U$76  [SDA8]  96.01,8.38 90 top
U$77  [GND1]  90.93,8.38 90 bottom
U$78  [3#3V2]  93.47,8.38 90 bottom
U$79  [SDA8]  96.01,8.38 90 bottom
U$80  [SCL9]  98.55,8.38 90 bottom
U$81  [#SHUT15]  103.63,8.13 90 top
U$82  [#SHUT15]  103.63,8.13 90 bottom
U$83  [(PWR)]  85.22,14.61 0 top
U$84  [(I_SUPER2_C)]  99.19,25.53 0 bottom
U$85  [(INT)]  90.55,15.24 0 bottom
U$86  [QWIIC-LOGO-SMALL]  107.44,10.67 0 top
U$87  [INT#-[<]  101.09,8.13 90 top
U$88  [INT#-[<]  101.09,8.13 90 bottom
U$89  SFE_LOGO_NAME_FLAME.1_INCH  [SFE_LOGO_NAME_FLAME_.1]  128.91,26.67 0 bottom
U$90  SFE_LOGO_NAME.1_INCH  [SFE_LOGO_NAME_.1]  117.09,28.45 0 top
U$91  [QWIIC_DISTANCE0]  129.54,20.32 0 bottom
U$92  [VL53L1X1]  127.13,18.54 0 bottom
U$93  [QWIIC_DISTANCE0]  117.09,27.94 0 top
U$94  [VL53L1X1]  119.13,26.29 0 top
U$95  [3#3V2]  119.38,8.38 90 top
U$96  [GND1]  116.84,8.38 90 top
U$97  [SCL9]  124.46,8.38 90 top